# Allegro board EB3b.brd
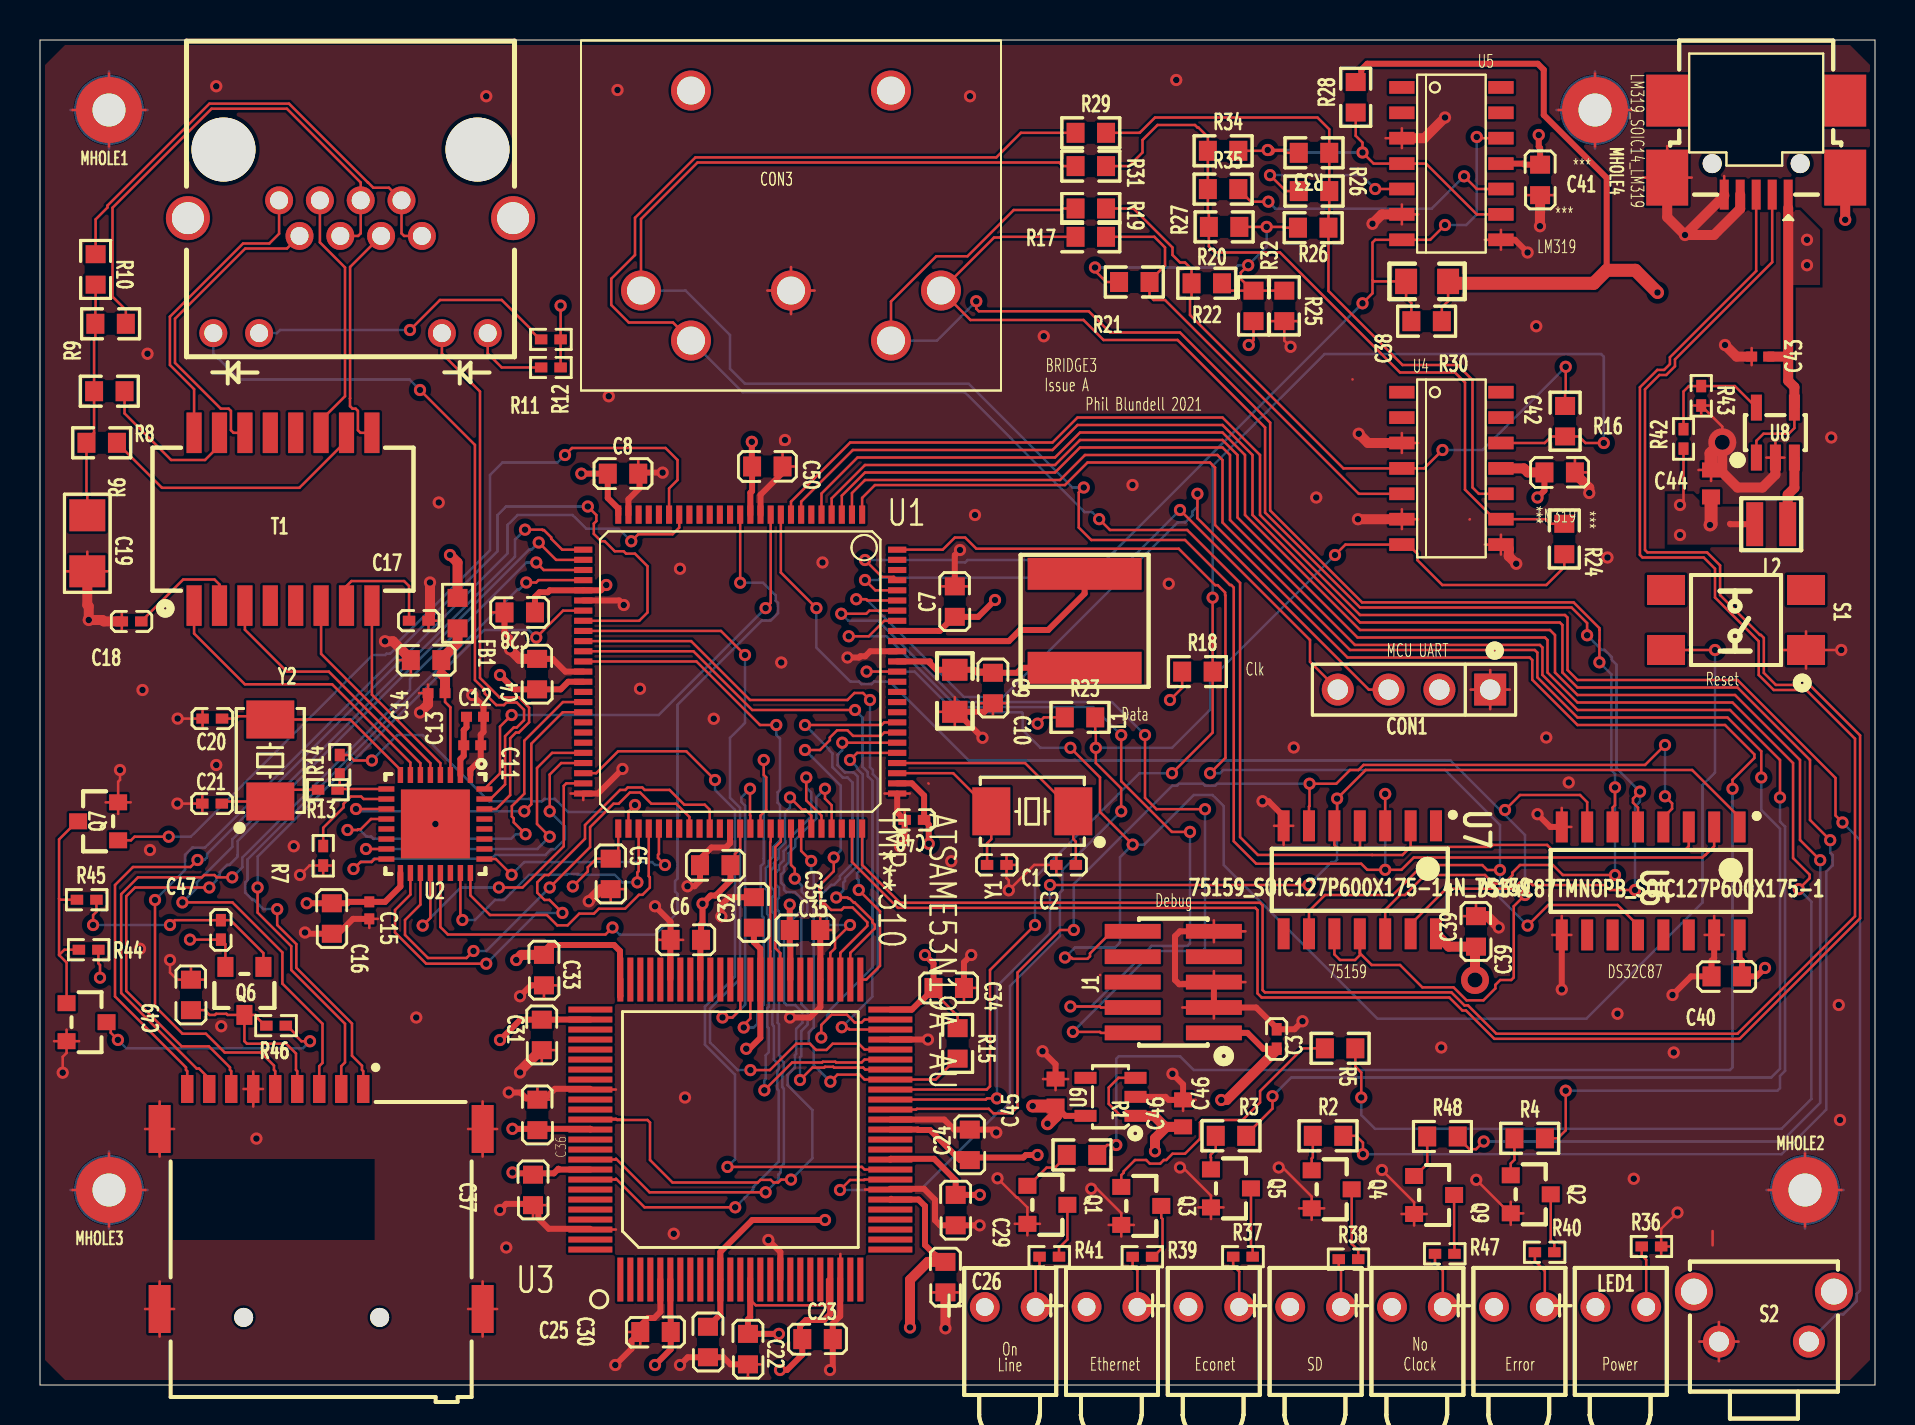
[diagram p0: board, top side]
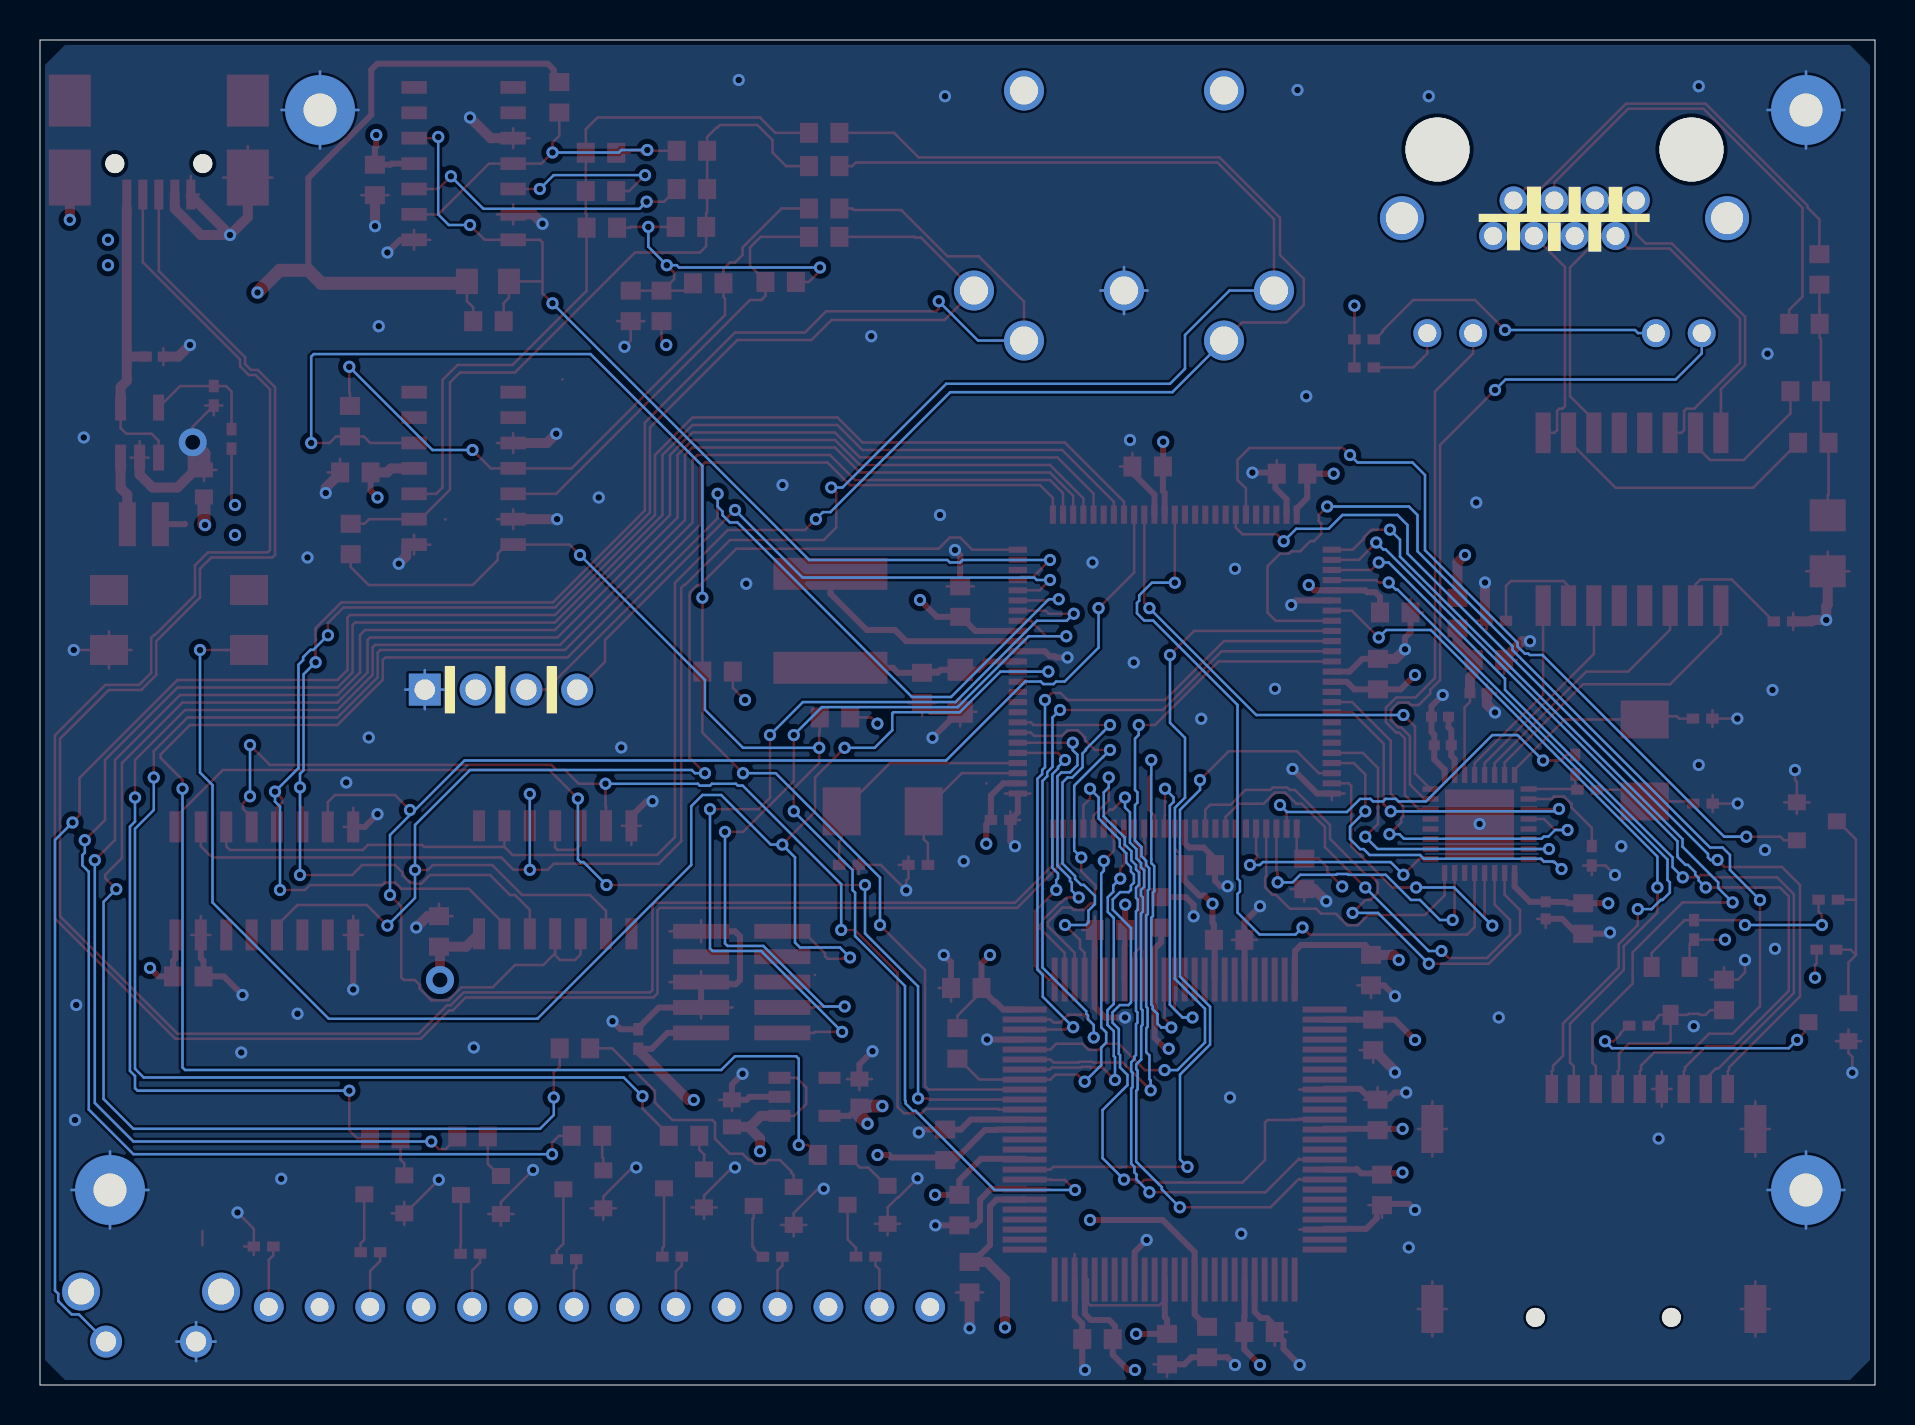
[diagram p1: board, bottom side, seen from below]

Outline 91.75 x 67.25 mm; copper layers: TOP, GROUND, POWER, BOTTOM. Coordinates in mm from the lower left corner of the outline.
Outline path: 0,67.25 91.75,67.25 91.75,0 0,0 0,67.25

## Design rules (mm)
constraint set DEFAULT: min track width 0.127

## Placement (name value [footprint] x y rotation side)
C1  22pF  [C-0402-H0_5]  47.84 26 0 top
C2  22pF  [C-0402-H0_5]  51.3 26 180 top
C3  100nF  [C-0402-H0_5]  61.84 17.3 90 top
C4  100nF  [C-0603-H0_8]  24.85 35.54 90 top
C5  100nF  [C-0603-H0_8]  28.53 25.55 270 top
C6  100nF  [C-0603-H0_8]  33.76 25.99 180 top
C7  100nF  [C-0603-H0_8]  45.74 39.17 90 top
C8  100nF  [C-0603-H0_8]  29.15 45.57 0 top
C9  100nF  [C-0603-H0_8]  47.65 34.85 270 top
C10  4.7uF  [C-0805-H1_35]  45.74 34.71 270 top
C11  100nF  [CAPC1005_IS0402Q]  21.61 31.99 0 top
C12  2.2uF  [CAPC1005_IS0402Q]  21.75 33.41 0 top
C13  100nF  [CAPC1005_IS0402Q]  19.83 34.59 180 top
C14  22uF  [C-0603-H0_8]  19.3 36.24 180 top
C15  100nF  [CAPC1005_IS0402Q]  16.46 23.73 270 top
C16  22uF  [C-0603-H0_8]  14.59 23.32 270 top
C17  10nF  [C-0402-H0_5]  18.94 38.21 0 top
C18  10nF  [C-0402-H0_5]  4.58 38.18 180 top
C19  1nF  [C-1206-H1_6]  2.37 42.09 270 top
C20  22pF  [C-0402-H0_5]  8.62 33.32 180 top
C21  22pF  [C-0402-H0_5]  8.6 29.07 180 top
C22  100nF  [C-0603-H0_8]  35.4 1.79 270 top
C23  100nF  [C-0603-H0_8]  38.88 2.29 0 top
C24  100nF  [C-0603-H0_8]  46.49 12.01 90 top
C25  100nF  [C-0603-H0_8]  30.77 2.65 180 top
C26  100nF  [C-0603-H0_8]  45.27 5.39 270 top
C27  100nF  [C-0603-H0_8]  32.29 22.26 180 top
C28  100nF  [C-0603-H0_8]  23.99 38.63 180 top
C29  100nF  [C-0603-H0_8]  45.78 8.74 270 top
C30  100nF  [C-0603-H0_8]  33.4 2.15 270 top
C31  100nF  [C-0603-H0_8]  25.09 17.5 270 top
C32  100nF  [C-0603-H0_8]  35.69 23.63 90 top
C33  100nF  [C-0603-H0_8]  25.2 20.74 270 top
C34  100nF  [C-0603-H0_8]  45.44 19.85 0 top
C35  100nF  [C-0603-H0_8]  38.25 22.75 0 top
C36  100nF  [C-0603-H0_8]  24.87 13.5 90 top
C37  100nF  [C-0603-H0_8]  24.65 9.75 270 top
C38  10uF  [C-0805-H1_35]  69.36 55.18 180 top
C39  100nF  [C-0603-H0_8]  71.8 22.68 90 top
C40  100nF  [C-0603-H0_8]  84.34 20.43 180 top
C41  100nF  [C-0603-H0_8]  75.01 60.25 270 top
C42  100nF  [C-0603-H0_8]  75.98 45.63 0 top
C43  4.7uF  [CAPC1005_IS0402Q]  86.01 51.42 180 top
C44  22uF  [CAPC1608_IS0603Q]  83.55 45.08 90 top
C45  1uF  [CAPC1608_IS0603Q]  50.78 14.62 90 top
C46  1uF  [CAPC1608_IS0603Q]  57.15 13.58 90 top
C47  10nF  [C-0402-H0_5]  9.05 22.75 90 top
C48  1uF  [C-0402-H0_5]  43.72 28.25 180 top
C49  100nF  [C-0603-H0_8]  7.55 19.5 90 top
C50  100nF  [C-0603-H0_8]  36.37 45.93 0 top
CON1  GPHA101-0402A60-1  [HEADER-1X4-P2_54-H8_5]  68.7 34.77 180 top
CON2  RJR31-1F08-PK10-TS  [JACK-RJ45-DIP16-H13_5]  15.52 58.34 180 top
CON3  -  [DIN5]  37.55 52.22 0 top
FB1  600Z  [L-0603-H0_8]  20.88 38.59 270 top
J1  20021121-00010C4LF  [HEADER-SMD-2X5-P1_27-H6_12]  56.66 20.14 90 top
J3  MEM2075-00-140-01-A  [GCT_MEM2075-00-140-01-A]  13.58 3.38 0 top
L1  10uH  [L-6_0X6_0-H4_5-A]  52.23 38.21 180 top
L2  2.2uH  [L-2_5X2_0-H1_2]  86.56 43.04 180 top
LED1  LED_GREEN  [LED-DIP2-P2_54-H7_3]  79.04 3.9 180 top
LED2  LED_YELLOW  [LED-DIP2-P2_54-H7_3]  58.69 3.9 180 top
LED3  LED_YELLOW  [LED-DIP2-P2_54-H7_3]  63.78 3.9 180 top
LED4  LED_YELLOW  [LED-DIP2-P2_54-H7_3]  53.6 3.9 180 top
LED5  LED_RED  [LED-DIP2-P2_54-H7_3]  73.97 3.9 180 top
LED6  LED_GREEN  [LED-DIP2-P2_54-H7_3]  48.51 3.9 180 top
LED7  LED_RED  [LED-DIP2-P2_54-H7_3]  68.87 3.9 180 top
MHOLE1  MNT_HOLE  [C3_3D1_65]  3.45 63.75 0 top
MHOLE2  MNT_HOLE  [C3_3D1_65]  88.25 9.75 0 top
MHOLE3  MNT_HOLE  [C3_3D1_65]  3.45 9.75 0 top
MHOLE4  MNT_HOLE  [C3_3D1_65]  77.75 63.75 0 top
P1  CON USB MINIB  [USB-MINIB-P0_8-H3_95]  85.81 61.07 180 top
Q1  MMBT3904  [Q-SOT23-H1_1]  50.37 9.01 270 top
Q2  MMBT3904  [Q-SOT23-H1_1]  74.54 9.53 270 top
Q3  MMBT3904  [Q-SOT23-H1_1]  55.06 8.95 270 top
Q4  MMBT3904  [Q-SOT23-H1_1]  64.58 9.78 270 top
Q5  MMBT3904  [Q-SOT23-H1_1]  59.55 9.83 270 top
Q6  AO3401A  [Q-SOT23-H1_25]  10.22 19.7 180 top
Q7  NX7002AK  [Q-SOT23-H1_1]  2.91 28.18 90 top
Q8  NX7002AK  [Q-SOT23-H1_1]  2.33 18.14 270 top
Q9  MMBT3904  [Q-SOT23-H1_1]  69.71 9.5 270 top
R1  10K  [R-0603-H0_45]  52.1 11.5 0 top
R2  10K  [R-0603-H0_45]  64.4 12.46 0 top
R3  10K  [R-0603-H0_45]  59.55 12.46 0 top
R4  10K  [R-0603-H0_45]  74.48 12.33 0 top
R5  10K  [R-0603-H0_45]  65.01 16.83 0 top
R6  75R  [R-0603-H0_45]  3.09 47.11 180 top
R7  6.49K  [R-0402-H0_35]  14.16 26.46 270 top
R8  75R  [R-0603-H0_45]  3.47 49.69 180 top
R9  75R  [R-0603-H0_45]  3.53 53.06 180 top
R10  75R  [R-0603-H0_45]  2.78 55.78 270 top
R11  240R  [R-0402-H0_35]  25.54 50.88 180 top
R12  240R  [R-0402-H0_35]  25.54 52.28 180 top
R13  0R  [R-0402-H0_35]  14.39 29.76 180 top
R14  OR  [R-0402-H0_35]  14.99 31.01 90 top
R15  10K  [R-0603-H0_45]  45.88 17.08 270 top
R16  1.5M  [R-0603-H0_45]  76.25 48.19 270 top
R17  100K  [R-0603-H0_45]  52.54 57.41 0 top
R18  1K  [R-0603-H0_45]  57.87 35.67 0 top
R19  100K  [R-0603-H0_45]  52.54 58.83 0 top
R20  10K  [R-0603-H0_45]  58.34 55.09 0 top
R21  10K  [R-0603-H0_45]  54.72 55.15 180 top
R22  1.5K  [R-0603-H0_45]  60.67 53.95 90 top
R23  1K  [R-0603-H0_45]  52 33.38 0 top
R24  1.5M  [R-0603-H0_45]  76.22 42.3 270 top
R25  1K  [R-0603-H0_45]  62.22 53.95 270 top
R26  10K  [R-0603-H0_45]  63.66 57.86 0 top
R27  10K  [R-0603-H0_45]  59.2 57.91 180 top
R28  1.5M  [R-0603-H0_45]  65.78 64.39 90 top
R29  100K  [R-0603-H0_45]  52.54 62.61 0 top
R30  1K  [R-0603-H0_45]  69.33 53.19 180 top
R31  100K  [R-0603-H0_45]  52.54 60.95 0 top
R32  56K  [R-0603-H0_45]  63.7 59.7 180 top
R33  56K  [R-0603-H0_45]  63.7 61.61 180 top
R34  56K  [R-0603-H0_45]  59.16 61.71 0 top
R35  56K  [R-0603-H0_45]  59.16 59.8 0 top
R36  240R  [R-0402-H0_35]  80.57 6.93 0 top
R37  240R  [R-0402-H0_35]  60.15 6.42 0 top
R38  240R  [R-0402-H0_35]  65.42 6.29 0 top
R39  240R  [R-0402-H0_35]  55.12 6.41 0 top
R40  240R  [R-0402-H0_35]  75.23 6.64 0 top
R41  240R  [R-0402-H0_35]  50.46 6.42 0 top
R42  68K  [R-0402-H0_35]  82.17 47.3 90 top
R43  15K  [R-0402-H0_35]  83.06 49.46 270 top
R44  47K  [R-0402-H0_35]  2.43 21.76 0 top
R45  150K  [R-0402-H0_35]  2.33 24.26 0 top
R46  240R  [R-0402-H0_35]  11.8 17.97 180 top
R47  240R  [R-0402-H0_35]  70.24 6.56 0 top
R48  10K  [R-0603-H0_45]  70.12 12.43 0 top
S1  TS-A02NB-2-S126  [SW-SMD4-4_5X4_5-H3_8-A]  84.8 38.25 270 top
S2  TS-A02NB-2-S126  [SW-DIP4-P4_5-H7_0]  86.2 2.17 0 top
T1  Pulse  H1102NL  [TRANS-SMD16-P1_27-H6_3]  12.15 43.29 0 top
U1  ATSAME53N19A-AU  [TQFP100]  35.01 35.67 270 top
U2  KSZ8081RNBCA-TR  [IC-VQFN32-5X5-P0_5-H1_0-B]  19.77 28.05 180 top
U3  iCE40HX1K-VQ100  [VQ100_FP]  35.02 12.77 90 top
U4  LM319  [SOIC14]  70.57 45.83 0 top
U5  LM319  [SOIC14]  70.57 61.07 0 top
U6  DS34C87TM_1_N  [SOIC127P600X175-16N]  80.53 25.2 270 top
U7  75159  [SOIC127P600X175-14N]  65.99 25.26 270 top
U8  TLV62569DBV  [IC-SOT23-5-P0_95-H1_45-A]  86.77 47.62 0 top
U9  AP2127R-1.0TRG1  [IC-SOT23-5-P0_95-H1_45]  53.53 14.41 90 top
Y1  25MHz  [XTAL-SMD2-5_2X3_4-H1_3]  49.62 28.69 180 top
Y2  25MHz  [XTAL-SMD2-5_2X3_4-H1_3]  11.52 31.23 90 top

## Library data of the parts
C1-C10 C14 C16-C42 C47-C50 = CAP
C11 C13 C15 = CAP: User Part Number: TMP-255
C12 = CAP: User Part Number: 16-00333
C43 = CAP: User Part Number: 16-00295
C44-C46 = CAP: User Part Number: 16-00334
CON1 = HDR1X4-LOCK-1R-J_1
CON2 = RJ45_NOSHIELD_0
CON3 = DIN5_0
FB1 = FB
J1 = HDR2x5-005
J3 = MEM2075-00-140-01-A
L1 L2 = IND-SHIELDED_0
LED1-LED7 = LED
MHOLE1-MHOLE4 = TP
P1 = CON_USB_MINI-B
Q1-Q5 Q9 = MMBT3904/SOT_1
Q6 = PMOS_SOT23
Q7 Q8 = NMOS_SOT23
R1-R48 = RES
S1 S2 = SW PUSHBUTTON_4
T1 = RJ45-T_0
U1 = ATSAME53N19A-AU: Tolerance: ***; User Part Number: TMP-310
U2 = KSZ8081RNB
U3 = ICE40HX1K-VQ100
U4 U5 = LM319: Tolerance: ***; User Part Number: ***
U6 = DS34C87TMNOPB
U7 = 75159
U8 = TLV62569
U9 = TPS71710-SO5_5
Y1 Y2 = XTAL

## Footprints (pads in the part's own frame, mm; a bottom-side part is the same pattern mirrored in y, then rotated)
C3_3D1_65
  round 3.3 hole 1.65: 1(0,0)
C-0402-H0_5
  rect 0.625x0.5 smd: 1(-0.487,0) 2(0.487,0)
C-0603-H0_8
  rect 0.9x1 smd: 1(-0.762,0) 2(0.762,0)
C-0805-H1_35
  rect 1.1x1.27 smd: 1(-1.05,0) 2(1.05,0)
C-1206-H1_6
  rect 1.6x1.8 smd: 1(-1.4,0) 2(1.4,0)
CAPC1005_IS0402Q
  rect 0.55x0.5 smd: 1(-0.425,0) 2(0.425,0)
CAPC1608_IS0603Q
  rect 0.75x0.9 smd: 1(-0.675,0) 2(0.675,0)
DIN5
  round 2 hole 1.4: 1(-7.5,2.5) 2(0,2.5) 3(7.5,2.5) 4(-5,0) 5(5,0) 6(5,12.5) 7(-5,12.5)
GCT_MEM2075-00-140-01-A
  round 0.95 hole 0.95 unplated: (-3.4,0) (3.4,0)
  rect 0.62x1.4 smd: P1(2.58,11.42) P2(1.48,11.42) P3(0.38,11.42) P4(-0.72,11.42) P5(-1.82,11.42) P6(-2.92,11.42) P7(-4.02,11.42) P8(-5.12,11.42) P9(-6.22,11.42)
  rect 1.1x2.4 smd: SH1(-7.6,0.42) SH2(-7.6,9.42) SH3(8.55,9.42) SH4(8.55,0.42)
HEADER-1X4-P2_54-H8_5
  rect 1.6x1.6 hole 1.02: 1(-3.81,0)
  round 1.6 hole 1.02: 2(-1.27,0) 3(1.27,0) 4(3.81,0)
HEADER-SMD-2X5-P1_27-H6_12
  rect 0.74x2.8 smd: 1(-2.54,-2.03) 2(-2.54,2.03) 3(-1.27,-2.03) 4(-1.27,2.03) 5(0,-2.03) 6(0,2.03) 7(1.27,-2.03) 8(1.27,2.03) 9(2.54,-2.03) 10(2.54,2.03)
IC-SOT23-5-P0_95-H1_45
  rect 0.6x1.1 smd: 1(-0.95,-1.25) 2(0,-1.25) 3(0.95,-1.25) 4(0.95,1.25) 5(-0.95,1.25)
IC-SOT23-5-P0_95-H1_45-A
  rect 0.55x1.3 smd: 1(-0.95,-1.25) 2(0,-1.25) 3(0.95,-1.25) 4(0.95,1.25) 5(-0.95,1.25)
IC-VQFN32-5X5-P0_5-H1_0-B
  rect 0.27x0.8 smd: 1(-1.75,-2.45) 2(-1.25,-2.45) 3(-0.75,-2.45) 4(-0.25,-2.45) 5(0.25,-2.45) 6(0.75,-2.45) 7(1.25,-2.45) 8(1.75,-2.45) 17(1.75,2.45) 18(1.25,2.45) 19(0.75,2.45) 20(0.25,2.45) 21(-0.25,2.45) 22(-0.75,2.45) 23(-1.25,2.45) 24(-1.75,2.45)
  rect 0.8x0.27 smd: 9(2.45,-1.75) 10(2.45,-1.25) 11(2.45,-0.75) 12(2.45,-0.25) 13(2.45,0.25) 14(2.45,0.75) 15(2.45,1.25) 16(2.45,1.75) 25(-2.45,1.75) 26(-2.45,1.25) 27(-2.45,0.75) 28(-2.45,0.25) 29(-2.45,-0.25) 30(-2.45,-0.75) 31(-2.45,-1.25) 32(-2.45,-1.75)
  rect 3.449x3.449 smd: 33(0,0)
JACK-RJ45-DIP16-H13_5
  round 3.2 hole 3.2 unplated: (-6.35,-3.43) (6.35,-3.43)
  round 1.4 hole 0.9: A1(3.57,-0.89) A2(2.55,0.89) A3(1.53,-0.89) A4(0.51,0.89) A5(-0.51,-0.89) A6(-1.53,0.89) A7(-2.55,-0.89) A8(-3.57,0.89) A9(-4.57,5.75) A10(-6.86,5.75) A11(6.86,5.75) A12(4.57,5.75)
  round 2.2 hole 1.6: S1(8.13,0) S2(-8.13,0)
L-2_5X2_0-H1_2
  rect 0.85x2.2 smd: 1(-0.825,0) 2(0.825,0)
L-6_0X6_0-H4_5-A
  rect 5.7x1.6 smd: 1(0,-2.35) 2(0,2.35)
L-0603-H0_8
  rect 0.9x1 smd: 1(-0.762,0) 2(0.762,0)
LED-DIP2-P2_54-H7_3
  round 1.49 hole 0.89: 1(1.27,0) 2(-1.27,0)
Q-SOT23-H1_1
  rect 0.8x0.9 smd: 1(-0.95,-1) 2(0.95,-1) 3(0,1)
Q-SOT23-H1_25
  rect 0.8x1 smd: 1(-0.95,-1.2) 2(0.95,-1.2) 3(0,1.2)
R-0402-H0_35
  rect 0.625x0.5 smd: 1(-0.487,0) 2(0.487,0)
R-0603-H0_45
  rect 0.9x1 smd: 1(-0.762,0) 2(0.762,0)
SOIC14
  rect 1.27x0.635 smd: 1(-2.477,3.81) 2(-2.477,2.54) 3(-2.477,1.27) 4(-2.477,0) 5(-2.477,-1.27) 6(-2.477,-2.54) 7(-2.477,-3.81) 8(2.477,-3.81) 9(2.477,-2.54) 10(2.477,-1.27) 11(2.477,0) 12(2.477,1.27) 13(2.477,2.54) 14(2.477,3.81)
SOIC127P600X175-14N
  rect 1.55x0.6 smd: 1(-2.7,3.81) 2(-2.7,2.54) 3(-2.7,1.27) 4(-2.7,0) 5(-2.7,-1.27) 6(-2.7,-2.54) 7(-2.7,-3.81) 8(2.7,-3.81) 9(2.7,-2.54) 10(2.7,-1.27) 11(2.7,0) 12(2.7,1.27) 13(2.7,2.54) 14(2.7,3.81)
SOIC127P600X175-16N
  rect 1.55x0.6 smd: 1(-2.7,4.445) 2(-2.7,3.175) 3(-2.7,1.905) 4(-2.7,0.635) 5(-2.7,-0.635) 6(-2.7,-1.905) 7(-2.7,-3.175) 8(-2.7,-4.445) 9(2.7,-4.445) 10(2.7,-3.175) 11(2.7,-1.905) 12(2.7,-0.635) 13(2.7,0.635) 14(2.7,1.905) 15(2.7,3.175) 16(2.7,4.445)
SW-DIP4-P4_5-H7_0
  round 1.6 hole 1: 1(-2.25,0) 2(2.25,0)
  round 1.9 hole 1.3: 3(-3.5,2.5) 4(3.5,2.5)
SW-SMD4-4_5X4_5-H3_8-A
  rect 1.501x1.9 smd: 1(1.5,3.5) 2(1.5,-3.5) 3(-1.5,3.5) 4(-1.5,-3.5)
TQFP100
  rect 0.914x0.305 smd: 1(-7.849,6.096) 2(-7.849,5.588) 3(-7.849,5.08) 4(-7.849,4.572) 5(-7.849,4.064) 6(-7.849,3.556) 7(-7.849,3.048) 8(-7.849,2.54) 9(-7.849,2.032) 10(-7.849,1.524) 11(-7.849,1.016) 12(-7.849,0.508) 13(-7.849,0) 14(-7.849,-0.508) 15(-7.849,-1.016) 16(-7.849,-1.524) 17(-7.849,-2.032) 18(-7.849,-2.54) 19(-7.849,-3.048) 20(-7.849,-3.556) 21(-7.849,-4.064) 22(-7.849,-4.572) 23(-7.849,-5.08) 24(-7.849,-5.588) 25(-7.849,-6.096) 51(7.849,-6.096) 52(7.849,-5.588) 53(7.849,-5.08) 54(7.849,-4.572) 55(7.849,-4.064) 56(7.849,-3.556) 57(7.849,-3.048) 58(7.849,-2.54) 59(7.849,-2.032) 60(7.849,-1.524) 61(7.849,-1.016) 62(7.849,-0.508) 63(7.849,0) 64(7.849,0.508) 65(7.849,1.016) 66(7.849,1.524) 67(7.849,2.032) 68(7.849,2.54) 69(7.849,3.048) 70(7.849,3.556) 71(7.849,4.064) 72(7.849,4.572) 73(7.849,5.08) 74(7.849,5.588) 75(7.849,6.096)
  rect 0.305x0.914 smd: 26(-6.096,-7.849) 27(-5.588,-7.849) 28(-5.08,-7.849) 29(-4.572,-7.849) 30(-4.064,-7.849) 31(-3.556,-7.849) 32(-3.048,-7.849) 33(-2.54,-7.849) 34(-2.032,-7.849) 35(-1.524,-7.849) 36(-1.016,-7.849) 37(-0.508,-7.849) 38(0,-7.849) 39(0.508,-7.849) 40(1.016,-7.849) 41(1.524,-7.849) 42(2.032,-7.849) 43(2.54,-7.849) 44(3.048,-7.849) 45(3.556,-7.849) 46(4.064,-7.849) 47(4.572,-7.849) 48(5.08,-7.849) 49(5.588,-7.849) 50(6.096,-7.849) 76(6.096,7.849) 77(5.588,7.849) 78(5.08,7.849) 79(4.572,7.849) 80(4.064,7.849) 81(3.556,7.849) 82(3.048,7.849) 83(2.54,7.849) 84(2.032,7.849) 85(1.524,7.849) 86(1.016,7.849) 87(0.508,7.849) 88(0,7.849) 89(-0.508,7.849) 90(-1.016,7.849) 91(-1.524,7.849) 92(-2.032,7.849) 93(-2.54,7.849) 94(-3.048,7.849) 95(-3.556,7.849) 96(-4.064,7.849) 97(-4.572,7.849) 98(-5.08,7.849) 99(-5.588,7.849) 100(-6.096,7.849)
TRANS-SMD16-P1_27-H6_3
  rect 0.76x2.03 smd: 1(-4.445,-4.32) 2(-3.175,-4.32) 3(-1.905,-4.32) 4(-0.635,-4.32) 5(0.635,-4.32) 6(1.905,-4.32) 7(3.175,-4.32) 8(4.445,-4.32) 9(4.445,4.32) 10(3.175,4.32) 11(1.905,4.32) 12(0.635,4.32) 13(-0.635,4.32) 14(-1.905,4.32) 15(-3.175,4.32) 16(-4.445,4.32)
USB-MINIB-P0_8-H3_95
  round 0.95 hole 0.95 unplated: (-2.2,0) (2.2,0)
  rect 0.45x1.5 smd: 1(-1.6,1.55) 2(-0.8,1.55) 3(0,1.55) 4(0.8,1.55) 5(1.6,1.55)
  rect 2.1x2.8 smd: 6(4.45,0.7) 9(-4.45,0.7)
  rect 2.1x2.6 smd: 7(4.45,-3.15) 8(-4.45,-3.15)
VQ100_FP
  rect 2.2x0.3 smd: 1(-7.5,6) 2(-7.5,5.5) 3(-7.5,5) 4(-7.5,4.5) 5(-7.5,4) 6(-7.5,3.5) 7(-7.5,3) 8(-7.5,2.5) 9(-7.5,2) 10(-7.5,1.5) 11(-7.5,1) 12(-7.5,0.5) 13(-7.5,0) 14(-7.5,-0.5) 15(-7.5,-1) 16(-7.5,-1.5) 17(-7.5,-2) 18(-7.5,-2.5) 19(-7.5,-3) 20(-7.5,-3.5) 21(-7.5,-4) 22(-7.5,-4.5) 23(-7.5,-5) 24(-7.5,-5.5) 25(-7.5,-6) 51(7.5,-6) 52(7.5,-5.5) 53(7.5,-5) 54(7.5,-4.5) 55(7.5,-4) 56(7.5,-3.5) 57(7.5,-3) 58(7.5,-2.5) 59(7.5,-2) 60(7.5,-1.5) 61(7.5,-1) 62(7.5,-0.5) 63(7.5,0) 64(7.5,0.5) 65(7.5,1) 66(7.5,1.5) 67(7.5,2) 68(7.5,2.5) 69(7.5,3) 70(7.5,3.5) 71(7.5,4) 72(7.5,4.5) 73(7.5,5) 74(7.5,5.5) 75(7.5,6)
  rect 0.3x2.2 smd: 26(-6,-7.5) 27(-5.5,-7.5) 28(-5,-7.5) 29(-4.5,-7.5) 30(-4,-7.5) 31(-3.5,-7.5) 32(-3,-7.5) 33(-2.5,-7.5) 34(-2,-7.5) 35(-1.5,-7.5) 36(-1,-7.5) 37(-0.5,-7.5) 38(0,-7.5) 39(0.5,-7.5) 40(1,-7.5) 41(1.5,-7.5) 42(2,-7.5) 43(2.5,-7.5) 44(3,-7.5) 45(3.5,-7.5) 46(4,-7.5) 47(4.5,-7.5) 48(5,-7.5) 49(5.5,-7.5) 50(6,-7.5) 76(6,7.5) 77(5.5,7.5) 78(5,7.5) 79(4.5,7.5) 80(4,7.5) 81(3.5,7.5) 82(3,7.5) 83(2.5,7.5) 84(2,7.5) 85(1.5,7.5) 86(1,7.5) 87(0.5,7.5) 88(0,7.5) 89(-0.5,7.5) 90(-1,7.5) 91(-1.5,7.5) 92(-2,7.5) 93(-2.5,7.5) 94(-3,7.5) 95(-3.5,7.5) 96(-4,7.5) 97(-4.5,7.5) 98(-5,7.5) 99(-5.5,7.5) 100(-6,7.5)
XTAL-SMD2-5_2X3_4-H1_3
  rect 1.9x2.4 smd: 1(-2.05,0) 2(2.05,0)

## Nets
GND: C1.2 C2.2 C3.2 C4.2 C5.2 C6.2 C7.2 C8.2 C9.2 C10.2 C11.2 C12.2 C13.2 C14.2 C15.2 C16.2 C17.2 C18.2 C19.2 C20.2 C21.2 C22.2 C23.2 C24.2 C25.2 C26.2 C27.2 C28.2 C29.2 C30.2 C31.2 C32.2 C33.2 C34.2 C35.2 C36.2 C37.2 C39.2 C40.2 C41.2 C42.2 C43.2 C44.2 C45.2 C46.2 C48.2 C49.2 C50.2 CON1.1 CON3.2 J1.3 J1.5 J1.9 J3.P6(VSS) J3.SH1 J3.SH2 J3.SH3 J3.SH4 MHOLE1.1(TP) MHOLE2.1(TP) MHOLE3.1(TP) MHOLE4.1(TP) P1.4 P1.5 P1.6 Q1.2(E) Q2.2(E) Q3.2(E) Q4.2(E) Q5.2(E) Q7.2(SOURCE) Q8.2(SOURCE) Q9.2(E) R7.2 R25.2 R36.2 R43.2 S1.1 S2.1 U1.11 U1.24 U1.31 U1.38 U1.50 U1.62 U1.76 U1.90 U2.1 U2.33 U3.5 U3.17 U3.23 U3.32 U3.39 U3.47 U3.55 U3.70 U3.84 U3.98 U4.3 U4.6 U4.8 U5.3 U5.6 U5.8 U6.8 U6.9 U6.15 U7.7 U8.2 U9.2
VCC1V2: C29.1 C30.1 C31.1 C32.1 C45.1 U3.11 U3.35 U3.61 U3.77 U9.5(OUT)
VCC3V3: C3.1 C4.1 C5.1 C6.1 C7.1 C8.1 C15.1 C16.1 C22.1 C23.1 C24.1 C25.1 C26.1 C27.1 C28.1 C33.1 C34.1 C35.1 C36.1 C37.1 C38.1 C44.1 C46.1 C47.1 C48.1 C50.1 FB1.1 J1.1 L2.2 LED1.1 LED2.1 LED3.1 LED4.1 LED5.1 LED6.1 LED7.1 Q6.2(SOURCE) R11.1 R12.1 R15.1 R18.1 R23.1 R28.2 R30.1 R42.1 R44.2 U1.12 U1.25 U1.30 U1.39 U1.51 U1.63 U1.77 U1.92 U2.17 U3.6 U3.14 U3.22 U3.31 U3.38 U3.50 U3.58 U3.67 U3.75 U3.88 U3.92 U9.1 U9.3
VCC5V: C39.1 C40.1 C41.1 C42.1 C43.1 P1.1 R22.1 U4.11(VCC) U5.11(VCC) U6.16(VDD) U7.14(VCC) U8.1 U8.4(VIN)
6: CON3.6
7: CON3.7
C+: CON3.5 R19.1 U6.6 U7.12
C-: CON3.3 R17.1 U6.5 U7.13
CLK: R16.2 R18.2 U3.42 U4.12
CLOCKOUT: U1.9 U6.7 U7.10 U7.11
CLOCKOUT_EN: U1.100 U6.12 U7.9
COLLISION: C38.2 R30.2 U1.97 U5.7 U5.12
D+: CON3.1 R31.1 U6.2 U7.3
D-: CON3.4 R29.1 U6.3 U7.2
FPGA_CDONE: R15.2 U1.69 U3.43
FPGA_CLK: U1.48 U3.34
FPGA_CRESET#: U1.68 U3.44
FPGA_IRQ#: U1.72 U3.87
FPGA_MISO: U1.37 U3.45
FPGA_MOSI: U1.34 U3.46
FPGA_RESET: U1.64 U3.63
FPGA_SCK: U1.35 U3.48
FPGA_SS#: U1.36 U3.49
FRONT_BUTTON: S2.2 U1.8
IDLE: U1.70 U3.93
LED_ECONET: Q5.1 R3.1
LED_ERROR: Q2.1 R4.1
LED_ETHERNET: Q3.1 R5.1
LED_NO_CLOCK: Q9.1 R48.1
LED_ONLINE: Q1.1 R1.1
LED_SD: Q4.1 R2.1
M_MISO: U1.83 U3.54
M_MOSI: U1.80 U3.51
M_SCK: U1.81 U3.52
M_SS#: U1.82 U3.53
MDI_RX+: T1.6 U2.5
MDI_RX-: T1.8 U2.4
MII_CLK: U1.58 U2.19
MII_CRSDV: U1.60 U2.18
MII_MDC: U1.41 U2.12
MII_MDIO: U1.42 U2.11
MII_RXD0: U1.47 U2.16
MII_RXD1: U1.46 U2.15
MII_RXER: U1.49 U2.20
MII_TXD0: U1.54 U2.24
MII_TXD1: U1.55 U2.25
MII_TXEN: U1.53 U2.23
NC1: T1.4
NC2: T1.5
NC3: T1.13
NC4: T1.12
NO_CLOCK: U1.71 U3.91
PHY_CLK: R14.2 U1.52
PHY_INT#: U1.13 U2.21
PHY_RESET#: U1.10 U2.32(\R\S\T)
RESET_BUTTON: J1.10 S1.2 U1.88
RX_ENABLE: U1.65 U3.62
RXDATA: R23.2 R24.2 U3.33 U4.7
RXN: CON2.A6 T1.9
RXP: CON2.A3 T1.11
SD_CLK: J3.P5 U1.33
SD_CMD: J3.P3 U1.26
SD_D0: J3.P7 U1.27
SD_D1: J3.P8 U1.28
SD_D2: J3.P1 U1.29
SD_D3: J3.P2 U1.32
SD_NCD: J3.P9 U1.19
SD_POWER: Q7.1 U1.20
TX_ERROR: U1.67 U3.59
TX_JABBER: U1.66 U3.60
TXDATA: U3.41 U6.1 U7.4 U7.5
TXEN: U3.40 U6.4 U7.6
TXN: CON2.A2(TX-) T1.14(TX-)
TXP: CON2.A1 T1.16
USB_DM: P1.2 U1.74
USB_DP: P1.3 U1.75
VPP_FAST: U3.76(VPP_FAST)
XI: R13.1 R14.1 U2.9
XO: C20.1 U2.8 Y2.2
N10035: R17.2 R21.1 U4.5
N10039: R16.1 R19.2 R20.1 U4.4
N10075: R20.2 R21.2 R22.2 R25.1 R26.1 R27.1
N10247: R24.1 R27.2 R31.2 R34.1 R35.1 U4.9
N10255: R26.2 R29.2 R32.1 R33.1 U4.10
N10407: R28.1 R33.2 R34.2 U5.4 U5.9
N10423: R32.2 U5.5
N10491: R35.2 U5.10
N12071: C49.1 J3.P4 Q6.3 R46.2
N18155: C9.1 C10.1 L1.2 U1.89
N18159: L1.1 U1.91(VSW)
N19501: J1.2 U1.94
N19513: J1.4 U1.93
N5977686: CON1.4 U1.96
N5977690: CON1.3 U1.95
N16768770: CON2.A9 U2.30
N16768786: CON2.A11 U2.31
N16768794: CON2.A12 R12.2
N16768802: CON2.A10 R11.2
N16768960: C19.1 R6.2 R8.2 R9.2 R10.2
N16769014: CON2.A7 CON2.A8 R10.1
N16769030: CON2.A4 CON2.A5 R9.1
N16769054: R6.1 T1.10
N16769058: R8.1 T1.15
N16769189: T1.1 U2.7
N16769193: T1.3 U2.6
N16769792: C18.1 T1.2
N16769796: C17.1 T1.7
N16769958: C11.1 C12.1 U2.2
N16770521: R7.1 U2.10
N16771702: C13.1 C14.1 FB1.2 U2.3
N16773022: L2.1 U8.3
N16773042: R42.2 R43.1 U8.5
N16774611: LED1.2(CATHODE) R36.1
N16774615: LED2.2(CATHODE) R37.1
N16774619: LED3.2(CATHODE) R38.1
N16774623: LED4.2(CATHODE) R39.1
N16780117: C1.1 U1.78 Y1.2
N16780131: C2.1 U1.79 Y1.1
N16797607: LED5.2(CATHODE) R40.1
N16797657: Q5.3 R37.2
N16797664: Q4.3 R38.2
N16797671: Q3.3 R39.2
N16797678: Q2.3 R40.2
N16798224: Q1.3 R41.2
N16798251: LED6.2(CATHODE) R41.1
N16799036: R1.2 U1.1
N16799045: R3.2 U1.2
N16799054: R2.2 U1.7
N16805969: C21.1 R13.2 Y2.1
N16814032: C47.2 Q6.1 R45.2
N16814038: Q7.3 Q8.1 R44.1 R45.1
N16814079: Q8.3 R46.1
N16818824: R4.2 U1.3
N16818884: R5.2 U1.4
N16820221: LED7.2(CATHODE) R47.1
N16820237: Q9.3 R47.2
N16820568: R48.2 U1.5

Pads without a net: CON1 2; CON2 S1 S2; J1 6 7 8; P1 7 8 9; S1 3 4; S2 3 4; U1 6 14 15 16 17 18 21 22 23 40 43 44 45 56 57 59 61 73 84 85 86 87 98 99; U2 13 14 22 26 27 28 29; U3 1 2 3 4 7 8 9 10 12 13 15 16 18 19 20 21 24 25 26 27 28 29 30 36 37 56 57 64 65 66 68 69 71 72 73 74 78 79 80 81 82 83 85 86 89 90 94 95 96 97 99 100; U4 1 2 13 14; U5 1 2 13 14; U6 10 11 13 14; U7 1 8; U9 4

## Via types
v1: diameter 0.61, hole 0.33, TOP to BOTTOM, 310 vias
v2: diameter 1.4, hole 0.75, TOP to BOTTOM, 2 vias

## Routing (per net, layer and track width the routed paths; a pad name or vN(x,y) marks a point on that pad's centre or on a via; arc(x,y) is an arc through that point)
GND: length 475.5
  TOP w0.127: P1.6 82.59,60.37 ; P1.6 80.13,60.37 ; P1.6 81.36,61.95 ; 4.09,38.61 C18.2 4.09,37.75 ; 45.74,32.93 C10.2 ; C10.2 44.93,33.66 ; C10.2 45.74,34.39 ; 37.13,46.6 C50.2 37.76,45.93 ; MHOLE4.1 77.75,65.58 ; MHOLE4.1 75.92,63.75 ; MHOLE4.1 77.75,61.92 ; MHOLE4.1 79.58,63.75 ; 41.24,9.77 U3.32 43.8,9.77 ; J3.SH1 5.98,5.18 ; J3.SH1 5.98,2.42 ; J3.SH1 6.71,3.8 ; J3.SH1 5.25,3.8 ; C21.2 v1(6.87,29.07) ; C21.2 8.12,28.64 ; C21.2 8.12,29.5 ; J3.P6 10.66,15.68 ; J3.P6 11.15,14.8 ; J3.P6 10.17,14.8 ; J3.P6 10.66,13.92 ; 43.49,29.57 U1.76 42.22,29.57 ; R43.2 84.12,47.92 v2(84.12,47.13) ; R43.2 83.06,48.48 ; R43.2 83.49,48.97 ; R43.2 82.63,48.97 ; 3.45,7.92 MHOLE3.1 ; MHOLE3.1 3.45,11.58 ; MHOLE3.1 5.28,9.75 ; MHOLE3.1 1.62,9.75 ; MHOLE1.1 5.28,63.75 ; MHOLE1.1 3.45,61.92 ; MHOLE1.1 1.62,63.75 ; MHOLE1.1 3.45,65.58 ; 36.37,54.72 CON3.2 ; CON3.2 38.73,54.72 ; CON3.2 37.55,55.9 ; CON3.2 37.55,53.54 ; 42.74,28.25 C48.2 43.23,28.68 ; 25.88,19.98 C33.2 25.2,19.35 ; 24.19,14.27 C36.2 ; C36.2 24.87,14.89 ; C36.2 25.55,14.27 ; R25.2 62.89,53.19 ; R25.2 61.54,53.19 ; R25.2 62.22,52.22 v1(62.53,51.91) ; U4.6 68.91,43.29 ; U4.6 68.09,42.79 ; U4.6 68.09,43.79 ; 27.16,29.24 U1.50 26.53,29.57 ; 23.97,8.99 C37.2 ; C37.2 25.33,8.99 ; C37.2 24.65,8.36 ; 77.37,45.63 C42.2 76.75,46.31 ; Q5.2 58.55,9.47 57.14,10.88 v1(57,10.88) ; Q5.2 57.92,8.88 ; Q5.2 59.18,8.88 ; Q5.2 58.55,8.3 ; R7.2 14.59,25.97 ; R7.2 13.47,25.97 v1(13,25.5) ; R7.2 14.16,25.48 ; U4.3 68.91,47.1 ; U4.3 68.09,46.6 ; U4.3 68.09,47.6 ; 48.74,8.06 Q1.2 ; Q1.2 49.37,7.48 ; Q1.2 50,8.06 ; Q1.2 49.37,8.88 48.88,9.37 48.84,9.37 v1(47.88,10.33) ; 28.8,7.77 U3.98 26.24,7.77 ; 47.65,33.46 C9.2 ; C9.2 46.97,34.09 ; C9.2 48.32,34.09 ; 83.55,45.2 C44.2 ; C44.2 84.18,45.75 ; C44.2 82.92,45.75 ; 44.42,30.08 44.43,30.07 ; 35.4,0.4 C22.2 36.08,1.03 ; 46.2,19.17 C34.2 46.83,19.85 ; J3.SH3 22.86,12.8 ; J3.SH3 21.4,12.8 ; J3.SH3 22.13,14.18 ; J3.SH3 22.13,11.42 ; 5.25,12.8 J3.SH2 ; J3.SH2 5.98,11.42 ; J3.SH2 5.98,14.18 ; J3.SH2 6.71,12.8 ; 72.23,42.02 U4.8 ; U4.8 73.05,41.52 ; U4.8 73.05,42.52 ; 62.96,8.83 Q4.2 ; Q4.2 64.21,8.83 ; Q4.2 63.58,9.42 62.13,10.88 v1(61.94,10.88) ; Q4.2 63.58,8.26 ; 75.61,22.5 U6.9 ; U6.9 76.09,23.46 ; U6.9 76.57,22.5 ; 54.06,7.43 Q3.2 ; Q3.2 54.69,8 ; Q3.2 54.06,8.59 52.85,9.81 v1(52.56,9.81) ; Q3.2 53.44,8 ; 83.23,22.5 U6.15 ; U6.15 83.71,23.46 ; U6.15 84.19,22.5 ; 28.53,24.16 C5.2 29.21,24.79 ; 57.12,18.88 J1.3 58.7,18.33 ; v1(81.88,8.62) 81.06,7.81 R36.2 ; Q2.2 73.49,8.58 v1(71.81,10.26) ; Q2.2 73.54,9.16 ; Q2.2 73.54,8.01 ; Q2.2 74.16,8.58 ; 22.13,2.42 J3.SH4 ; J3.SH4 22.86,3.8 ; J3.SH4 21.4,3.8 ; J3.SH4 22.13,5.18 ; 50.82,25.58 C2.2 ; C2.2 50.82,26.43 ; C2.2 49.71,26 v1(48.44,24.73) 48.44,25.23 48.33,25.34 C1.2 ; 83.81,59.52 P1.5 84.21,60.45 ; v1(67.1,10.75) 68.71,9.14 Q9.2 ; 74.33,59.49 C41.2 75.68,59.49 ; C27.2 32.16,22.26 ; C27.2 31.53,21.58 ; C27.2 30.9,22.26 ; 62.18,27.01 U7.7 ; U7.7 62.66,27.96 ; U7.7 61.7,27.96 ; 16.46,22.85 C15.2 16.89,23.31 ; 28.8,14.77 U3.84 26.24,14.77 ; 29.91,44.89 C8.2 ; C8.2 29.91,46.24 ; C8.2 30.54,45.57 ; 19.4,35.02 C13.2 18.95,34.59 ; 29.38,2.65 C25.2 30.01,1.97 ; C20.2 v1(6.88,33.32) ; C20.2 8.13,32.89 ; C20.2 8.13,33.75 ; C1.2 48.33,26.43 ; C1.2 48.82,26 ; J1.5 58.7,20.69 ; J1.5 60.27,20.14 ; J1.5 57.12,20.14 ; 72.51,33.79 CON1.1 ; CON1.1 73.49,34.77 ; CON1.1 72.51,35.75 ; CON1.1 71.53,34.77 ; 44.59,4.63 C26.2 45.95,4.63 ; 58.7,22.14 J1.9 ; J1.9 58.7,23.23 ; J1.9 60.27,22.68 ; 50.78,14.74 C45.2 ; C45.2 51.41,15.3 ; C45.2 50.15,15.3 ; 71.49,43.29 71.48,43.27 ; R36.2 81.55,6.93 ; R36.2 81.06,6.5 ; U5.6 68.91,58.53 ; U5.6 68.09,59.03 ; U5.6 68.09,58.03 ; 86.32,46.37 U8.2 ; U8.2 86.77,47.2 ; U8.2 87.22,46.37 ; 39.64,22.75 C35.2 39.01,23.43 ; 25.77,16.74 C31.2 25.09,16.11 ; U5.3 68.09,62.84 ; U5.3 68.09,61.84 ; U5.3 67.28,62.34 ; 0.7,17.19 Q8.2 ; Q8.2 1.33,16.6 1.13,16.41 v1(1.13,15.61) ; Q8.2 1.96,17.19 ; Q8.2 1.33,17.77 ; 85.58,50.99 C43.2 85.58,51.85 ; Q9.2 69.33,8.55 ; Q9.2 68.71,7.97 ; Q9.2 68.08,8.55 ; 40.02,3.99 U3.23 40.02,6.55 ; MHOLE2.1 90.08,9.75 ; MHOLE2.1 86.42,9.75 ; MHOLE2.1 88.25,11.58 ; MHOLE2.1 88.25,7.92 ; 71.12,23.44 C39.2 71.8,24.07 ; C49.2 7.55,20.89 ; C49.2 8.23,20.27 ; C49.2 6.86,20.27 6.5,20.62 v1(6.5,21.25) ; 3.91,28.56 Q7.2 ; Q7.2 4.53,29.13 ; Q7.2 3.91,30.16 4,30.25 v1(4,30.75) ; Q7.2 3.28,29.13 ; 83.63,6.99 83.63,7.7 ; 72.23,57.26 U5.8 ; U5.8 73.05,56.76 ; U5.8 73.05,57.76 ; 83.95,1.19 S2.1 ; S2.1 84.92,2.17 ; S2.1 83.95,3.15 ; S2.1 82.97,2.17 ; C19.2 2.37,41.66 ; C19.2 1.29,40.69 ; C19.2 3.44,40.69 ; 65.62,50.28 65.63,50.28 ; C17.2 19.43,38.64 ; C17.2 19.43,37.79 ; C17.2 19.92,38.21 ; 17.91,36.24 C14.2 18.54,35.57 ; S1.1 88.3,37.68 ; S1.1 87.17,36.75 ; S1.1 88.3,35.82 ; S1.1 v1(90.06,36.75) ; 45.06,39.93 C7.2 46.42,39.93 ; 23.22,39.31 C28.2 22.6,38.63 ; 57.15,13.7 C46.2 57.78,14.26 ; 53.01,20.5 53,20.5 ; 76.57,27.9 U6.8 76.09,28.86
  TOP w0.3: v1(23.5,36.78) 23.5,37.37 23.22,37.64 C28.2 ; v1(43,26.94) 43.23,27.17 C48.2 42.86,28.63 U1.76 ; v1(31.13,45.62) 29.98,45.62 29.98,44.84 29.42,44.29 U1.24 ; v1(47.12,32.36) 45.82,33.66 ; 45.82,33.66 47.22,33.66 C9.2 ; 45.82,33.66 C10.2 ; v1(74.88,28.54) 75.51,27.9 U6.8 ; v1(13.25,22.62) 13.31,22.56 C16.2 14.9,22.56 15.65,23.31 C15.2 ; U1.90 41.51,36.69 41.26,36.44 41.02,36.44 40.96,36.38 v1(40.38,36.38) ; v1(46,41.75) 45.74,41.49 C7.2 ; v1(47.81,12.62) 47.67,12.77 C24.2 45.71,12.77 45.21,13.27 U3.39 ; U5.8 73.75,57.26 v1(74.38,56.62) ; U2.1 21.52,30.77 22.04,31.28 C11.2 22.04,32.51 22.18,32.65 C12.2 22.18,33.94 v1(21.61,34.5) ; v1(23.44,14.62) 24.02,14.62 24.31,14.33 25.27,14.33 25.75,14.81 27.51,14.81 ; C35.2 39.01,21.97 39.02,21.97 U3.55 39.02,18.9 38.5,18.38 v1(37.5,18.38) ; U3.70 31.52,22.25 C27.2 31.53,23.16 v1(30.75,23.94) ; 40.01,5.31 40.01,3.44 39.64,3.07 C23.2 39.64,0.89 v1(39.5,0.75) ; v1(46.56,21.5) 46.2,21.14 C34.2 ; U1.11 36.03,44.51 37.13,45.61 C50.2 ; 37.12,47.12 v1(37.25,47.25) ; v1(32.38,24.94) 32.72,24.94 33,25.21 C6.2 33,26.3 33.57,26.88 34.29,26.88 34.5,27.09 U1.62 ; U6.15 83.71,21.34 83.58,21.21 C40.2 82.56,20.43 v1(81.62,19.5) ; v1(36.42,7.25) 37.02,6.65 U3.17 ; v1(56.62,15.56) 57.15,15.03 C46.2 56.43,14.26 56.28,14.41 U9.2 ; U1.38 26.27,35.67 25.63,36.31 C4.2 ; U1.31 28.96,39.23 v1(29.19,39) ; 42.51,9.81 44.2,9.81 44.75,9.26 44.75,8.24 45.01,7.98 C29.2 v1(46.98,7.98) ; v1(32,1) 32.39,1.39 C30.2 34.17,1.39 34.53,1.03 C22.2 ; C45.2 50.78,16.03 v1(50.12,16.69) ; U1.50 27.9,29.57 v1(29.12,30.8) ; 35.69,24.39 34.45,24.39 34.07,24.01 v1(34.07,23.43) ; v1(61.12,29.19) 61.43,29.19 62.18,28.44 U7.7 ; U6.9 v1(76.09,19.78) ; 27.51,7.81 25.44,7.81 24.91,8.33 24.91,9.06 23.31,9.06 v1(23,8.75) ; U3.5 31.02,3.65 30.71,3.35 30.4,3.35 30.01,2.96 C25.2 29.58,2.21 29.58,1.81 v1(28.76,1) ; v1(24,19.44) 24.54,19.98 24.97,19.98 ; J1.9 57,22.68 56.75,22.44 56.75,20.25 56.96,20.04 58.59,20.04 J1.5 J1.3 60.81,18.88 61.84,17.85 C3.2 62.72,17.79 v1(63.12,18.19) ; U3.47 v1(44.4,17.27)
  TOP w0.5: U5.6 67.09,58.53 v1(66.62,58.06) ; v1(19.5,40.12) 19.5,38.29 C17.2 ; U4.8 73.23,42.02 73.44,41.81 73.44,41.44 v1(73.81,41.06) ; P1.6 81.36,58.39 v1(82.25,57.5) ; v2(84.12,47.13) 84.12,45.63 84.88,44.87 86.12,44.87 86.77,45.52 U8.2 ; C42.2 76.75,45.58 77.46,44.86 v1(77.46,44.6) ; C41.2 75.01,58.63 75,58.62 v1(75,57.94) ; v1(84.25,52) 84.83,51.42 C43.2 ; v1(27.44,24.19) 28.04,24.79 C5.2 ; C14.2 18.54,36.29 17.65,37.19 v1(17.25,37.19) ; C26.2 v1(45.27,2.83) ; v1(65.94,47.56) 66.4,47.1 U4.3 ; P1.5 84.21,59.46 v1(82.25,57.5) ; C4.2 23.98,36.31 v1(23.5,36.78) ; P1.4 85.01,58.81 83.7,57.5 v1(82.25,57.5) ; v1(24,15.62) 24,15.7 25.04,16.74 C31.2 ; C13.2 19.4,34.03 v1(19,33.62) ; U4.6 v1(65.9,43.29) ; C39.2 72.37,23.44 v1(72.94,22.88) ; v1(70.25,63.38) 69.22,62.34 U5.3 ; C18.2 3.19,38.18 3.12,38.25 v1(2.44,38.25) 2.44,38.93 2.37,39 C19.2
  TOP w0.65: C44.2 83.55,46.57 v2(84.12,47.13)
  GROUND w0.127: 37.55,53.54 CON3.2 ; CON3.2 37.55,55.9 ; CON3.2 36.37,54.72 ; CON3.2 38.73,54.72 ; 3.45,7.92 MHOLE3.1 ; MHOLE3.1 3.45,11.58 ; MHOLE3.1 1.62,9.75 ; MHOLE3.1 5.28,9.75 ; 86.42,9.75 MHOLE2.1 ; MHOLE2.1 90.08,9.75 ; MHOLE2.1 88.25,11.58 ; MHOLE2.1 88.25,7.92 ; MHOLE4.1 77.75,65.58 ; MHOLE4.1 77.75,61.92 ; MHOLE4.1 75.92,63.75 ; MHOLE4.1 79.58,63.75 ; MHOLE1.1 3.45,65.58 ; MHOLE1.1 5.28,63.75 ; MHOLE1.1 1.62,63.75 ; MHOLE1.1 3.45,61.92 ; S2.1 83.95,3.15 ; S2.1 84.92,2.17 ; S2.1 83.95,1.19 ; S2.1 82.97,2.17 ; CON1.1 73.49,34.77 ; CON1.1 71.53,34.77 ; CON1.1 72.51,33.79 ; CON1.1 72.51,35.75
  BOTTOM w0.127: MHOLE1.1 3.45,65.68 ; MHOLE1.1 3.45,61.82 ; MHOLE1.1 1.52,63.75 ; MHOLE1.1 5.38,63.75 ; 36.37,54.72 CON3.2 ; CON3.2 37.55,55.9 ; CON3.2 38.73,54.72 ; CON3.2 37.55,53.54 ; 83.95,1.19 S2.1 ; S2.1 84.92,2.17 ; S2.1 83.95,3.15 ; S2.1 82.97,2.17 ; MHOLE3.1 3.45,11.68 ; MHOLE3.1 1.52,9.75 ; MHOLE3.1 3.45,7.82 ; MHOLE3.1 5.38,9.75 ; 75.82,63.75 MHOLE4.1 ; MHOLE4.1 77.75,65.68 ; MHOLE4.1 79.68,63.75 ; MHOLE4.1 77.75,61.82 ; 86.32,9.75 MHOLE2.1 ; MHOLE2.1 88.25,11.68 ; MHOLE2.1 90.18,9.75 ; MHOLE2.1 88.25,7.82 ; 72.51,33.79 CON1.1 ; CON1.1 71.53,34.77 ; CON1.1 73.49,34.77 ; CON1.1 72.51,35.75
  vias: v1(5,21.81) v1(5.12,34.75) v1(5.38,51.56) v1(5.5,26.75) v1(8.81,64.94) v1(8.81,31) v1(9.06,17.94) v1(10.82,12.32) v1(12.69,26.94) v1(18.81,18.38) v1(19.77,28.05) v1(19.94,44.12) v1(22.31,64.44) v1(23.31,6.88) v1(28.44,49.44) v1(28.88,64.75) v1(30,34.81) v1(31.69,7.56) v1(32,40.81) v1(32.25,14.38) v1(33.69,33.31) v1(37.06,36.12) v1(39.12,41.12) v1(45.56,26.19) v1(46.5,64.44) v1(46.75,43.5) v1(50.19,52.44) v1(54.62,45) v1(56.44,40.06) v1(56.81,65.25) v1(62.69,31.88) v1(63.81,44.38) v1(70.06,16.88) v1(74.81,52.94) v1(75.31,32.38) v1(76.44,30.12) v1(78.38,41.38) v1(78.88,18.56) v1(79.69,10.31) v1(81.69,16.62) v1(89.56,47.38) v1(89.94,19) v1(90,13.25)
VCC1V2: length 31
  TOP w0.3: v1(46.99,9.51) C29.1 45.78,10.23 44.71,11.31 42.54,11.31 42.51,11.28 U3.35 ; C45.1 51.27,13.46 U9.5 ; C32.1 35.69,22.14 36.02,21.82 U3.61 36.02,17.36 35.47,16.81 v1(35.31,16.81) ; v1(39.25,8.25) 35.62,8.25 34.02,6.65 U3.11 34.02,3.53 C30.1 ; U3.77 25.87,18.27 25.87,18.27 C31.1 24.02,18.27 v1(23,17.25)
  TOP w0.65: v1(49.63,13.95) C45.1 50.78,13.47 v1(50.38,13.06)
VCC3V3: length 214.1
  TOP w0.127: 35.4,3.2 35.52,3.32 35.52,4.25 ; R15.1 45.88,18.46 44.67,19.66 ; v1(56.5,34.25) 57.11,34.86 R18.1 ; v1(49.88,33.07) 50.19,33.38 R23.1 ; 44.67,19.66 44.67,19.8 ; 44.67,19.66 44.53,19.66 ; 35.52,4.25 U3.14 ; 35.52,4.25 35.79,3.98 39.25,3.98 39.36,4.09 39.36,5.27 U3.22 ; 23.55,12.81 23.62,12.74 C36.1 ; 44.03,19.16 43.68,18.81 42.51,18.81 ; Q6.2 9.27,22.04 C47.1 v1(7.5,22.27) ; R11.1 R12.1 v1(26.03,53.97) ; U9.1 54.03,13.46 53.44,14.06 53.44,14.87 53.92,15.36 U9.3 ; C38.1 70.41,54.19 70.09,53.88 R30.1 ; 45.69,38.41 C7.1 ; v1(26.64,24.93) 27.39,25.68 27.39,25.89 27.82,26.32 C5.1 28.91,26.7 U1.51 ; U1.63 35.01,26.81 34.75,26.55 34.75,26.22 C6.1 ; 33.48,24.41 33.64,24.41 34.52,25.3 ; R44.2 2.92,21.08 3,21 v1(3,20.36) ; v1(82,44) 82.17,44.17 R42.1 ; C37.1 23.73,10.52 23.67,10.58 ; C33.1 25.2,21.7
  TOP w0.3: C28.1 24.75,39.41 24.98,39.64 25.39,39.64 25.48,39.73 U1.30 28.05,39.73 v1(28.31,40) ; v1(23.62,10.62) 23.67,10.58 25.69,10.58 25.92,10.81 25.96,10.77 U3.92 ; 65.78,65.15 66.06,65.42 66.06,65.76 66.36,66.06 74.89,66.06 75.19,65.76 75.19,63.5 78.33,60.35 78.33,55.73 ; L2.2 84.52,43.04 84.5,43.06 ; U3.58 37.52,21.94 37.49,21.97 C35.1 v1(37.49,24.02) ; U1.39 26.41,35.16 26.03,34.78 C4.1 23.72,34.78 v1(23,35.5) ; v1(44.44,27.06) 44.44,28.02 C48.1 44.2,29.47 43.59,30.08 U1.77 ; v1(44.25,21.5) 44.67,21.08 C34.1 44.67,19.8 44.03,19.16 43.98,19.16 43.59,18.77 U3.50 ; 46.38,11.25 46,11.25 44.5,12.75 43.92,12.75 43.89,12.77 U3.38 ; 46.38,11.25 46.08,11.55 45.88,11.55 ; 46.38,11.25 C24.1 ; v1(47.75,39.25) 46.91,38.41 C7.1 ; C6.1 34.52,25.21 33.78,24.47 33.54,24.47 v1(33.12,24.06) 33.12,23.11 33.05,23.03 C27.1 33.02,22.22 U3.67 ; 23.55,12.81 v1(23.62,12.81) 25.27,12.81 25.27,12.81 27.51,12.81 27.52,12.8 U3.88 ; 29.01,20.31 29,20.32 ; 29,20.32 29,21.7 28.7,22 25.5,22 25.01,21.51 ; 29,20.32 29,19.43 29.02,19.45 U3.75 ; U1.25 28.91,43.82 28.39,44.35 C8.1 v1(27.07,45.57) ; C3.1 61.16,16.81 60.37,17.61 J1.1 ; 45.69,38.41 44.98,37.7 U1.92 ; 46.36,11.23 46.51,11.38 49.17,11.38 49.29,11.5 v1(49.88,11.5) ; v1(37,0.75) 37.35,0.75 38.11,1.52 C23.1 38,2.41 38,2.95 38.3,3.25 39.21,3.25 39.51,3.55 39.51,5.31 ; U2.17 18.02,24.92 17.25,24.16 C15.1 15.44,24.16 15.37,24.09 C16.1 v1(13.34,24.09) ; 35.51,5.31 35.51,3.4 35.4,3.28 C22.1 v1(36.94,2.56) ; v1(30.75,1) 31.54,1.79 C25.1 31.54,3.43 31.52,3.45 U3.6 ; U1.12 35.52,44.61 35.6,44.69 C50.1 35.59,45.94 v1(35.59,47.16) ; C26.1 45.02,6.4 44.87,6.4 44.77,6.5 44.75,6.5 44.25,7 44.25,8.95 43.92,9.27 U3.31 42.56,9.31
  TOP w0.5: U9.1 55.7,13.46 56.25,12.91 56.33,12.91 ; C46.1 56.33,12.91 ; 56.33,12.91 55.75,12.33 v1(55.75,11.69) ; v1(23.81,21.25) 24.07,21.51 C33.1 ; C3.1 61.84,16.75 59.33,14.25 v1(59.06,14.25) ; FB1.1 20.88,41.12 v1(20.5,41.5) ; U9.3 54.79,15.38 ; v1(43.5,2.88) 43.5,5.26 44.39,6.15 C26.1
  TOP w0.65: v1(80.88,54.62) 79.77,55.73 78.33,55.73 77.68,55.08 70.5,55.08 C38.1 ; v1(83.5,43) 83.55,43.05 C44.1 ; 65.84,65.15 65.78,65.15
  POWER w0.127: 72.7,2.98 LED5.1 ; LED5.1 73.62,3.9 ; LED5.1 72.7,4.83 ; LED5.1 71.78,3.9 ; LED6.1 47.24,4.82 ; LED6.1 46.32,3.9 ; LED6.1 48.16,3.9 ; LED6.1 47.24,2.98 ; LED2.1 57.42,4.83 ; LED2.1 58.34,3.9 ; LED2.1 57.42,2.98 ; LED2.1 56.5,3.9 ; LED7.1 67.6,4.83 ; LED7.1 67.6,2.98 ; LED7.1 66.68,3.9 ; LED7.1 68.52,3.9 ; LED4.1 53.25,3.9 ; LED4.1 51.41,3.9 ; LED4.1 52.33,4.83 ; LED4.1 52.33,2.98 ; 77.77,2.98 LED1.1 ; LED1.1 78.69,3.9 ; LED1.1 76.85,3.9 ; LED1.1 77.77,4.83 ; 62.51,2.98 LED3.1 ; LED3.1 63.43,3.9 ; LED3.1 61.59,3.9 ; LED3.1 62.51,4.83
  vias: v1(82,42.5)
VCC5V: length 31.6
  TOP w0.127: P1.1 87.41,58.84 ; v1(60.44,52) 60.67,52.24 R22.1 ; U8.1 85.82,47.21 86.17,47.56 87.44,47.56 87.72,47.85 U8.4
  TOP w0.3: v1(86.25,20.85) 85.83,20.43 C40.1 85.1,21.21 84.98,21.33 U6.16 ; v1(74.88,44.38) 75.22,44.72 C42.1 ; v1(74.94,62.5) 74.94,61.92 75.01,61.85 C41.1 74.23,61.02 74.17,61.07 U5.11
  TOP w0.5: v2(71.75,20.25) 71.75,21.87 C39.1 70.44,21.92 U7.14 ; 87.41,51.42 87.41,50.21 87.72,49.9 U8.4 ; 87.41,51.42 C43.1 ; 87.41,51.42 87.41,58.84 ; C42.1 74.39,45.63 74.19,45.83 U4.11
  vias: v1(88.35,57.26) v1(88.35,55.99)
C+: length 87.9
  TOP w0.127: v1(78.75,29.88) 78.75,28.99 78.63,28.87 U6.6 ; CON3.5 42.55,54.17 44.81,56.44 46.38,56.44 48.69,58.75 51.06,58.75 51.14,58.83 R19.1 51.78,58.77 ; U7.12 67.26,23.76 68,24.5 68.25,24.5 69.25,25.5 72.25,25.5 72.68,25.07 73.07,25.07 73.13,25.13 73.26,25.13 73.62,25.49 73.62,25.62 74,26 75.64,26 76.14,25.5 v1(78.75,25.5) ; v1(46.81,54.19) 46.81,53.81 46.94,53.69 52.44,53.69 53.5,52.62 57,52.62 61.51,48.12 61.51,43.73 66.11,39.13 76.68,39.13 77.97,37.84 77.97,37.75 77.98,37.75 77.98,37.23 77.97,37.22 v1(77.97,36.13)
  BOTTOM w0.127: v1(46.81,54.19) 44.85,52.22 CON3.5 ; v1(78.75,25.5) v1(78.75,29.88) 78.75,30.56 78.57,30.74 78.57,35.53 v1(77.97,36.13)
C-: length 78.9
  TOP w0.127: R17.1 48.03,57.41 48,57.38 47.7,57.38 CON3.3 46.52,53.25 52.17,53.25 53.17,52.25 56.88,52.25 61.25,47.88 61.25,43.62 66,38.88 76.58,38.88 77.36,38.1 v1(77.36,37.49) ; v1(79.75,24.75) 78.5,24.75 78.25,25 74.63,25 74.51,25.12 73.99,25.12 73.68,24.81 70.31,24.81 68.53,23.04 U7.13 ; U6.5 79.9,28.87 79.65,29.12 79.65,29.32 v1(80,29.67)
  BOTTOM w0.127: v1(79.75,24.75) 79.75,28.92 80,29.17 v1(80,29.67) 78.83,30.84 78.83,36.02 78.59,36.25 78.59,36.39 78.23,36.76 78.09,36.76 v1(77.36,37.49)
CLK: length 73.3
  TOP w0.127: v1(56.6,30.59) 58.63,32.62 R18.2 v1(58.63,39.37) ; v1(49.75,23) 47.5,20.75 47.5,14.94 47.34,14.77 U3.42 ; v1(78.19,47.1) 77.27,47.1 76.95,47.43 R16.2 75.56,47.43 75.24,47.1 U4.12
  BOTTOM w0.127: v1(49.75,23) 49.75,25.38 54.97,30.59 v1(56.6,30.59) ; v1(78.19,47.1) 78.19,51.42 78.06,51.55 64.22,51.55 58.63,45.96 v1(58.63,39.37)
CLOCKOUT: length 74
  TOP w0.127: U6.7 77.36,29.14 77,29.5 74,29.5 v1(73.25,28.75) ; U1.9 37.04,40.62 v1(38.82,38.84) ; v1(74.25,24.5) 73.69,23.94 73.69,20.38 73.56,20.25 73.01,20.25 72.77,20.01 72.77,19.83 72.17,19.23 71.33,19.23 70.68,19.88 69.12,19.88 68,21 66.58,21 65.99,21.59 U7.11 66,22.55 66,21.5 65.75,21.25 65,21.25 64.72,21.53 U7.10
  BOTTOM w0.127: 73.09,28.66 74.25,27.5 v1(74.25,24.5) ; 73.09,28.66 73.17,28.75 v1(73.25,28.75) ; 73.09,28.66 70.53,31.23 46.44,31.23 42.49,35.17 41.71,35.17 41.59,35.05 41.07,35.05 40.95,35.17 40.51,35.17 38.82,36.87 v1(38.82,38.84)
CLOCKOUT_EN: length 67
  TOP w0.127: v1(58.51,30.59) 59.27,31.36 59.27,39.48 59.25,39.5 59.25,39.63 58.89,39.99 58.76,39.99 56.94,41.81 46.82,41.81 46.26,42.37 45.74,42.37 45.14,41.77 U1.100 ; v1(74.38,22.97) 75.41,24 78.88,24 79.9,22.98 U6.12 ; U7.9 63.45,23.7 64.25,24.5 67.64,24.5 69.14,26 72.11,26 72.36,25.75 v1(73,25.75)
  BOTTOM w0.127: v1(74.38,22.97) 73,24.35 v1(73,25.75) 73,28 70.25,30.75 59.16,30.75 59,30.59 v1(58.51,30.59)
COLLISION: length 50.3
  TOP w0.127: 66.62,55.25 66.62,54.59 v1(66.12,54.09) ; 66.62,55.25 66.69,55.18 C38.2 68.31,54.35 68.57,54.09 R30.2 ; 66.62,55.25 66.62,57.12 66.76,57.26 U5.7 69.51,57.26 v1(70.25,58) ; U5.12 71.9,62.34 v1(71.84,62.4) ; U1.97 42.69,40.41 42.09,40.41 v1(41.25,41.25)
  BOTTOM w0.127: v1(41.25,41.25) 45.62,41.25 45.74,41.13 46.26,41.13 46.38,41.25 53.29,41.25 v1(66.12,54.09) ; v1(70.25,58) 71.31,58 71.84,58.53 v1(71.84,62.4)
D+: length 109
  TOP w0.127: U7.3 v1(67.26,29.55) ; U6.2 83.71,26.94 83.27,26.5 83.25,26.5 83.12,26.38 68.69,26.38 68.07,25.76 v1(67.26,25.76) 66.36,25.76 66.06,26.06 60.81,26.06 59.69,27.19 59.69,39.87 59.56,40 59.5,40 57.25,42.25 52.56,42.25 51.94,42.88 51.94,44.62 v1(52.19,44.88) ; R31.1 51.14,60.95 50.96,61.12 32.88,61.12 30.05,58.3 CON3.1
  BOTTOM w0.127: v1(52.19,44.88) 51.62,44.88 46.44,50.06 35.25,50.06 34.5,50.81 34.5,52.5 32.28,54.72 CON3.1 ; v1(67.26,29.55) v1(67.26,25.76)
D-: length 103.8
  TOP w0.127: CON3.4 31.65,53.12 29.44,53.12 28.56,54 28.56,55.31 29.75,56.5 29.75,58.36 32.77,61.38 47.82,61.38 49.05,62.61 R29.1 51.78,62.56 ; v1(52.96,43.29) 53.5,42.75 57.36,42.75 60,40.11 60,27.39 60.89,26.5 66.61,26.5 66.61,26.5 68.12,26.5 68.53,26.91 ; U6.3 82.44,26.94 82.25,26.75 75.61,26.75 75.36,27 72.64,27 72.55,26.91 68.53,26.91 ; 68.53,26.91 U7.2
  BOTTOM w0.127: v1(52.96,43.29) 52.61,43.64 52.23,43.64 46.23,49.64 35.13,49.64 CON3.4
FPGA_CDONE: length 20.6
  TOP w0.127: U1.69 38.06,26.7 v1(38.56,26.2) ; R15.2 45.83,16.32 44.78,15.27 U3.43 41.23,15.27 40.98,15.52 39.87,15.52 39.56,15.21 ; 39.56,15.21 v1(39.52,15.17) ; 39.56,15.21 39.56,15.31
  BOTTOM w0.127: v1(38.56,26.2) 38.56,25.71 38.69,25.58 38.69,17.88 38.44,17.63 38.44,17.12 38.69,16.87 38.69,16 v1(39.52,15.17)
FPGA_CLK: length 37
  TOP w0.127: v1(34.38,10.91) 41.09,10.91 41.23,10.77 U3.34 ; v1(33.75,30.25) 32.31,31.69 28.91,31.69 27.81,30.59 U1.48
  BOTTOM w0.127: v1(34.38,10.91) 34.75,11.28 34.75,15.52 33.25,17.02 33.25,18.92 34.75,20.42 34.75,28.75 33.75,29.75 v1(33.75,30.25)
FPGA_CRESET#: length 18.2
  TOP w0.127: v1(37.74,25.32) 37.74,25.82 37.55,26 U1.68 ; U3.44 41.26,15.77 41.16,15.87 39.7,15.87 39.66,15.91 39.25,15.91 39.21,15.87 38.62,15.87 v1(38,15.25)
  BOTTOM w0.127: v1(37.74,25.32) 38.09,24.97 38.09,24.66 38.36,24.38 38.36,23.66 38.06,23.36 38.06,19.05 38.38,18.74 38.38,18.01 38.06,17.7 38.06,16.45 38,16.39 v1(38,15.25)
FPGA_IRQ#: length 39.9
  TOP w0.127: v1(37.55,10.27) 37.05,10.27 36.91,10.12 36.67,10.12 36.54,10.26 36.02,10.26 35.89,10.12 31.62,10.12 30.5,11.25 30.5,13.12 30.37,13.25 29.19,13.25 ; 29.19,13.25 29.16,13.27 U3.87 ; 29.19,13.25 28.86,13.25 28.8,13.31 27.51,13.31 ; U1.72 39.58,28.99 39.25,29.32 v1(39.25,29.81)
  BOTTOM w0.127: v1(39.25,29.81) 38.82,29.38 38.82,28.32 37.76,27.27 37.76,26.91 37.44,26.59 37.44,26.12 37.2,25.89 37.2,25.67 37.05,25.53 37.05,25.11 37.2,24.97 37.2,24.75 37.31,24.64 37.75,24.64 38.11,24.28 38.11,23.76 37.2,22.86 37.2,19.12 37.33,19 37.76,19 38.12,18.63 38.12,18.12 37.81,17.8 37.81,16.55 37.75,16.49 37.75,15.88 37.38,15.51 37.38,14.99 38.62,13.75 38.62,11.34 v1(37.55,10.27)
FPGA_MISO: length 36.9
  TOP w0.127: U3.45 41.23,16.27 41.08,16.12 39.81,16.12 39.77,16.16 39.14,16.16 39.1,16.12 37.61,16.12 v1(36.22,14.73) ; U1.37 32.82,36.18 36,33 v1(36.81,33)
  BOTTOM w0.127: v1(36.22,14.73) 36.22,15.23 36.28,15.29 36.28,16.48 36.44,16.64 36.44,17.84 36.37,17.91 36.37,18.84 36.44,18.92 36.44,23.47 36.36,23.55 36.36,24.73 36.29,24.8 36.29,25.84 36.44,25.99 36.44,26.21 36.67,26.44 36.67,26.9 37,27.23 37,28.99 36.88,29.12 36.88,29.63 37,29.76 37,32.32 36.81,32.5 v1(36.81,33)
FPGA_MOSI: length 39.6
  TOP w0.127: U1.34 34.05,37.7 v1(35.25,36.5) ; v1(35.52,15.75) 36.49,15.75 37.81,17.06 38.49,17.06 38.8,16.75 39.32,16.75 39.63,17.06 40.94,17.06 41.23,16.77 U3.46
  BOTTOM w0.127: v1(35.25,36.5) 35.25,33.11 34.5,32.36 34.5,29.36 35,28.86 35,20.32 33.5,18.81 33.5,17.12 34.88,15.75 v1(35.52,15.75)
FPGA_RESET: length 17
  TOP w0.127: v1(35.5,29.81) 35.5,28.49 35.52,28.47 U1.64 ; U3.63 35.02,18.77 34.62,18.38 v1(34.12,18.38)
  BOTTOM w0.127: v1(35.5,29.81) 35.07,29.38 35.07,29.15 35.26,28.97 35.26,19.01 34.62,18.38 v1(34.12,18.38)
FPGA_SCK: length 35.6
  TOP w0.127: v1(41.5,34.25) 41.15,34.6 40.72,34.6 40.37,34.25 35.5,34.25 32.56,37.19 U1.35 ; v1(40.09,17.89) 40.17,17.81 40.44,17.81 40.47,17.77 U3.48
  BOTTOM w0.127: v1(41.5,34.25) 41.5,30.89 41.64,30.75 41.64,30.55 41.88,30.31 41.88,20.77 41.61,20.5 41.61,19.41 v1(40.09,17.89)
FPGA_SS#: length 37.1
  TOP w0.127: U3.49 41.23,18.27 41.08,18.12 40.74,18.12 40.35,18.51 39.57,18.51 39.06,18 v1(39.06,17.38) ; v1(40.75,33.75) 35.61,33.75 32.67,36.69 U1.36
  BOTTOM w0.127: v1(39.06,17.38) 39.06,18 39.35,18.29 39.35,18.48 39.44,18.56 39.44,18.69 41.62,20.88 41.62,30.2 41.39,30.44 41.39,30.64 41.12,30.91 41.12,33.38 v1(40.75,33.75)
FRONT_BUTTON: length 95.3
  TOP w0.127: U1.8 37.55,44.17 40.51,47.12 50.62,47.12 51.88,48.38 59.12,48.38 61,46.5 61,43.5 66,38.5 76.25,38.5 76.38,38.37 76.38,35.75 76.88,35.25 84.88,35.25 89.77,30.35 89.77,28.48 v1(90.12,28.12)
  BOTTOM w0.127: v1(90.12,28.12) 91,27.25 91,4.72 90.84,4.56 90.84,4.2 90.17,3.53 89.81,3.53 S2.2
IDLE: length 32.1
  TOP w0.127: v1(37.5,29.38) 38.1,28.77 38.26,28.77 38.57,28.47 U1.70 ; v1(34.76,8.89) 30.23,8.89 28.8,10.31 28.76,10.27 U3.93
  BOTTOM w0.127: v1(34.76,8.89) 35.66,9.78 35.66,9.89 36.94,11.17 36.94,14.71 36.87,14.78 36.87,15.72 36.94,15.79 36.94,16.03 36.69,16.27 36.69,17.94 36.62,18.01 36.62,18.74 36.7,18.81 36.7,23.57 36.61,23.66 36.61,24.38 36.7,24.47 36.7,24.76 36.55,24.9 36.55,25.74 36.7,25.88 36.7,26.1 36.93,26.33 36.93,26.8 37.25,27.12 37.25,28.63 37.5,28.88 v1(37.5,29.38)
LED_ECONET: length 1.8
  TOP w0.127: Q5.1 58.55,11.37 58.54,11.38 58.54,11.52 58.79,11.77 R3.1
LED_ERROR: length 1.9
  TOP w0.127: Q2.1 73.54,11.07 73.72,11.26 R4.1
LED_ETHERNET: length 14.4
  TOP w0.127: R5.1 63.14,16.83 61,14.7 61,14.13 60.12,13.25 58.13,13.25 58,13.12 58,12.31 57.25,11.56 56.62,11.56 56.31,11.25 56.19,11.25 56.01,11.07 55.49,11.07 55.31,11.25 54.75,11.25 54.19,10.69 54.19,10.62 54.06,10.49 Q3.1
LED_NO_CLOCK: length 2.3
  TOP w0.127: Q9.1 68.76,10.45 69.36,11.06 R48.1
LED_ONLINE: length 2.6
  TOP w0.127: R1.1 51.34,11.45 50.75,10.87 50.33,10.87 49.42,9.96 Q1.1
LED_SD: length 1.7
  TOP w0.127: Q4.1 63.58,11.32 63.64,11.38 R2.1
M_MISO: length 20.9
  TOP w0.127: U3.54 39.52,21.59 39.51,21.6 39.75,21.84 39.75,22.25 v1(40.5,23) ; U1.83 42.21,33.13 42.08,33 v1(38.25,33)
  BOTTOM w0.127: v1(40.5,23) 39.45,23 39.33,23.13 39.33,23.72 39,24.04 39,24.46 39.55,25 39.69,25 40,25.31 40,25.45 40.62,26.08 40.62,30.12 40.38,30.37 40.14,30.37 39.62,30.89 39.62,31.58 39.46,31.75 39.46,31.79 38.6,32.64 38.6,32.65 v1(38.25,33)
M_MOSI: length 14.9
  TOP w0.127: v1(40.5,31.25) 40.86,31.61 U1.80 ; v1(40.94,24.75) 42,23.69 42,20.96 41.31,20.27 U3.51
  BOTTOM w0.127: v1(40.94,24.75) 40.94,25.25 40.85,25.33 40.85,25.58 41.13,25.86 41.13,30.54 40.85,30.82 40.85,30.9 v1(40.5,31.25)
M_SCK: length 17.5
  TOP w0.127: v1(39.81,24.38) 40.38,24.38 40.43,24.32 40.49,24.32 40.68,24.13 40.73,24.13 41.62,23.24 41.62,23.13 41.74,23.01 41.74,22.83 40.52,21.61 U3.52 ; U1.81 v1(40.11,32.11)
  BOTTOM w0.127: v1(39.81,24.38) 40.16,24.73 40.16,25.11 40.25,25.2 40.25,25.34 40.88,25.97 40.88,30.43 40.68,30.63 40.24,30.63 39.88,30.99 39.88,31.51 40.11,31.74 v1(40.11,32.11)
M_SS#: length 20.4
  TOP w0.127: U1.82 42.21,32.62 42.05,32.46 40.65,32.46 40.37,32.74 39.86,32.74 39.49,32.37 39.49,32.24 39,31.75 v1(38.25,31.75) ; U3.53 40.02,21.59 40.01,21.6 41.36,22.96 41.36,23.14 40.63,23.87 40.19,23.87 40.07,23.75 39.55,23.75 39.24,24.06 39.13,24.06 39,24.19 39,24.75 38.96,24.79 38.96,24.96 39.69,25.69 v1(39.69,26.38)
  BOTTOM w0.127: v1(38.25,31.75) 38.6,31.4 38.61,31.4 40.04,29.97 40.04,26.73 v1(39.69,26.38)
MDI_RX+: length 10.7
  TOP w0.127: U2.5 19.52,31.09 14.05,36.56 T1.6
MDI_RX-: length 9.9
  TOP w0.127: U2.4 20.02,31.09 16.59,34.52 T1.8
MII_CLK: length 23.2
  TOP w0.127: U2.19 19.02,24.02 18.25,23.25 18.25,22.5 19.4,21.35 21.32,21.35 v1(21.68,21.7) ; U1.58 32.47,28.4 31.81,29.06 30.57,29.06 30.01,29.62 29.49,29.62 28.93,29.06 28.67,29.06 27.5,27.89 27.5,26.89 v1(25.48,24.88)
  BOTTOM w0.127: v1(21.68,21.7) 22.31,21.7 v1(25.48,24.88)
MII_CRSDV: length 27.9
  TOP w0.127: v1(22.31,21.07) 19.31,21.07 17.75,22.62 17.75,23.75 18.52,24.52 U2.18 ; U1.60 33.49,28.76 33.24,29.01 32.22,29.01 31.48,29.75 30.24,29.75 30.11,29.88 29.39,29.88 29.26,29.75 29,29.75 27.25,28 27.25,27.31 25.43,25.5 25.23,25.5 24.86,25.13 24.86,24.62 25.23,24.25 25.47,24.25 v1(26.12,23.61)
  BOTTOM w0.127: v1(22.31,21.07) 24.85,23.61 v1(26.12,23.61)
MII_MDC: length 20.3
  TOP w0.127: v1(15.38,27.75) 15.88,27.75 15.91,27.79 16.04,27.79 16.55,28.3 U2.12 ; v1(24.28,27.54) 23.69,28.13 23.69,28.33 23.59,28.43 23.59,28.94 24.21,29.57 24.21,32.22 26.15,34.15 U1.41
  BOTTOM w0.127: v1(15.38,27.75) 16,27.75 16.32,27.42 16.56,27.42 16.67,27.31 23.55,27.31 23.78,27.54 v1(24.28,27.54)
MII_MDIO: length 16.8
  TOP w0.127: v1(24.21,28.69) 24.57,29.04 24.57,32.07 26.14,33.64 U1.42 ; U2.11 v1(15.8,28.8)
  BOTTOM w0.127: v1(24.21,28.69) 15.92,28.69 v1(15.8,28.8)
MII_RXD0: length 18.5
  TOP w0.127: v1(25.48,28.69) 25.48,30.52 26.06,31.1 U1.47 ; U2.16 16.73,26.3 16.58,26.15 16.03,26.15 v1(15.67,25.8)
  BOTTOM w0.127: v1(15.67,25.8) 16.03,26.15 16.09,26.15 16.12,26.18 16.56,26.18 16.69,26.31 22.56,26.31 22.75,26.5 25.27,26.5 25.56,26.79 25.74,26.79 26.25,27.3 26.25,27.92 v1(25.48,28.69)
MII_RXD1: length 16.8
  TOP w0.127: U2.15 v1(16.3,26.8) ; v1(25.48,27.41) 24.85,28.05 24.85,30.85 25.61,31.61 U1.46
  BOTTOM w0.127: v1(16.3,26.8) 24.87,26.8 v1(25.48,27.41)
MII_RXER: length 15.5
  TOP w0.127: v1(22.95,24.88) 24.12,24.88 26.19,26.94 26.19,29.95 26.31,30.08 U1.49 ; v1(19.14,22.97) 19.52,23.36 U2.20
  BOTTOM w0.127: v1(19.14,22.97) 21.04,24.88 v1(22.95,24.88)
MII_TXD0: length 14.5
  TOP w0.127: U2.24 21.52,24.48 22.5,23.5 25.34,23.5 25.86,22.98 26.38,22.98 26.96,23.57 27.7,23.57 27.94,23.81 29.25,23.81 29.95,24.51 30.13,24.51 30.49,24.87 30.49,25.39 30.44,25.44 U1.54
MII_TXD1: length 11.7
  TOP w0.127: U2.25 22.79,26.3 v1(23.58,25.51) ; v1(31.25,26) 30.9,26.35 30.9,26.51 30.95,26.55 U1.55
  BOTTOM w0.127: v1(23.58,25.51) 24.21,26.14 30.61,26.14 30.75,26 v1(31.25,26)
MII_TXEN: length 15
  TOP w0.127: U2.23 21.02,23.35 v1(21.12,23.25) ; v1(29.87,25.13) 29.87,25.63 29.93,25.69 U1.53
  BOTTOM w0.127: v1(21.12,23.25) 21.75,23.25 22.75,24.25 23.2,24.25 24.46,25.51 26.34,25.51 26.38,25.55 26.9,25.55 26.94,25.51 28.74,25.51 29.12,25.13 v1(29.87,25.13)
Net_235: length 2.1
  TOP w0.5: 90.26,60.37 v1(90.26,58.26)
NO_CLOCK: length 34.6
  TOP w0.127: U3.91 28.76,11.27 28.8,11.31 30.48,9.64 v1(36.28,9.64) ; v1(38.31,30.38) 38.31,29.23 39.07,28.47 U1.71
  BOTTOM w0.127: v1(36.28,9.64) 36.93,10.28 36.93,10.53 37.03,10.63 37.03,10.91 37.19,11.07 37.19,14.82 37.12,14.89 37.12,15.61 37.19,15.68 37.19,16.13 37.03,16.3 37.03,16.42 36.95,16.5 36.95,18.05 36.88,18.12 36.88,18.63 36.95,18.7 36.95,23.68 36.87,23.76 36.87,24.28 36.95,24.36 36.95,24.86 36.8,25.01 36.8,25.63 36.95,25.78 36.95,26 37.18,26.23 37.18,26.69 37.51,27.02 37.51,27.37 38.56,28.43 38.56,29.63 38.31,29.88 v1(38.31,30.38)
PHY_CLK: length 18.7
  TOP w0.127: v1(16.59,31.23) 15.7,31.23 15.43,31.5 R14.2 ; v1(29.75,29) 29.42,28.67 U1.52
  BOTTOM w0.127: v1(16.59,31.23) 17.87,32.49 19.14,32.49 22.45,29.18 23.83,29.18 23.96,29.31 24.47,29.31 24.6,29.18 25.1,29.18 25.23,29.31 25.74,29.31 26.4,28.65 29.4,28.65 v1(29.75,29)
PHY_INT#: length 39.2
  TOP w0.127: v1(35.01,40.12) U1.13 ; v1(28.62,22.88) 28.27,22.52 20.39,22.52 20.02,22.9 U2.21
  BOTTOM w0.127: v1(28.62,22.88) 28.98,22.52 30.77,22.52 31.88,23.62 31.88,24.56 31.75,24.68 31.75,25.2 31.88,25.32 31.88,34.01 36.09,38.22 36.54,38.22 36.9,38.59 36.9,39.1 36.79,39.22 36.79,39.48 36.15,40.12 v1(35.01,40.12)
PHY_RESET#: length 24
  TOP w0.127: U2.32 23,30.58 23,32.92 v1(23.58,33.5) ; v1(36.28,38.84) 36.53,39.1 U1.10
  BOTTOM w0.127: v1(36.28,38.84) 30.93,33.5 v1(23.58,33.5)
RESET_BUTTON: length 85.8
  TOP w0.127: v1(83.75,36.75) 82.44,36.75 S1.2 ; v1(54.63,27.02) 53,28.66 53,30.38 v1(51.52,31.86) ; U1.88 v1(41.33,35.67) ; v1(51.25,21.38) 51.56,21.38 51.63,21.31 52.37,21.31 52.5,21.44 52.5,21.58 53.6,22.68 J1.10
  BOTTOM w0.127: v1(83.75,36.75) 83.75,30.62 83.12,30 83.12,24.12 77.31,18.31 66.88,18.31 59.19,26 59.19,28.94 58.62,29.5 57.69,29.5 55.21,27.02 v1(54.63,27.02) 54,26.38 54,22.12 53.75,21.88 51.75,21.88 v1(51.25,21.38) ; v1(41.33,35.67) 43.73,35.67 45.76,33.64 49.08,33.64 49.13,33.59 49.13,32.74 50.02,31.86 v1(51.52,31.86)
RX_ENABLE: length 20.3
  TOP w0.127: v1(36.19,31.25) 36.19,30.5 36.31,30.38 36.31,28.76 36.03,28.47 U1.65 ; U3.62 35.52,18.33 35.19,18 v1(35.19,17.88)
  BOTTOM w0.127: v1(35.19,17.88) 35.68,17.88 35.88,18.07 35.88,18.56 36.12,18.8 36.12,18.95 36.19,19.02 36.19,23.36 36.1,23.45 36.1,24.63 36.04,24.69 36.04,25.95 36.19,26.1 36.19,26.31 v1(36.19,31.25)
